# Altium PCB Digit.PcbDoc
Units mm, origin at the board's own origin, x right, y up, seen from the top; angles counter-clockwise.
Board outline 137.16 x 139.7 mm, 4 copper layers (Top Layer, Mid-Layer 1, Mid-Layer 2, Bottom Layer); 175 components, 147 nets, 626 pads, 146 vias.
Unrouted connection lines stored in the file: 3.
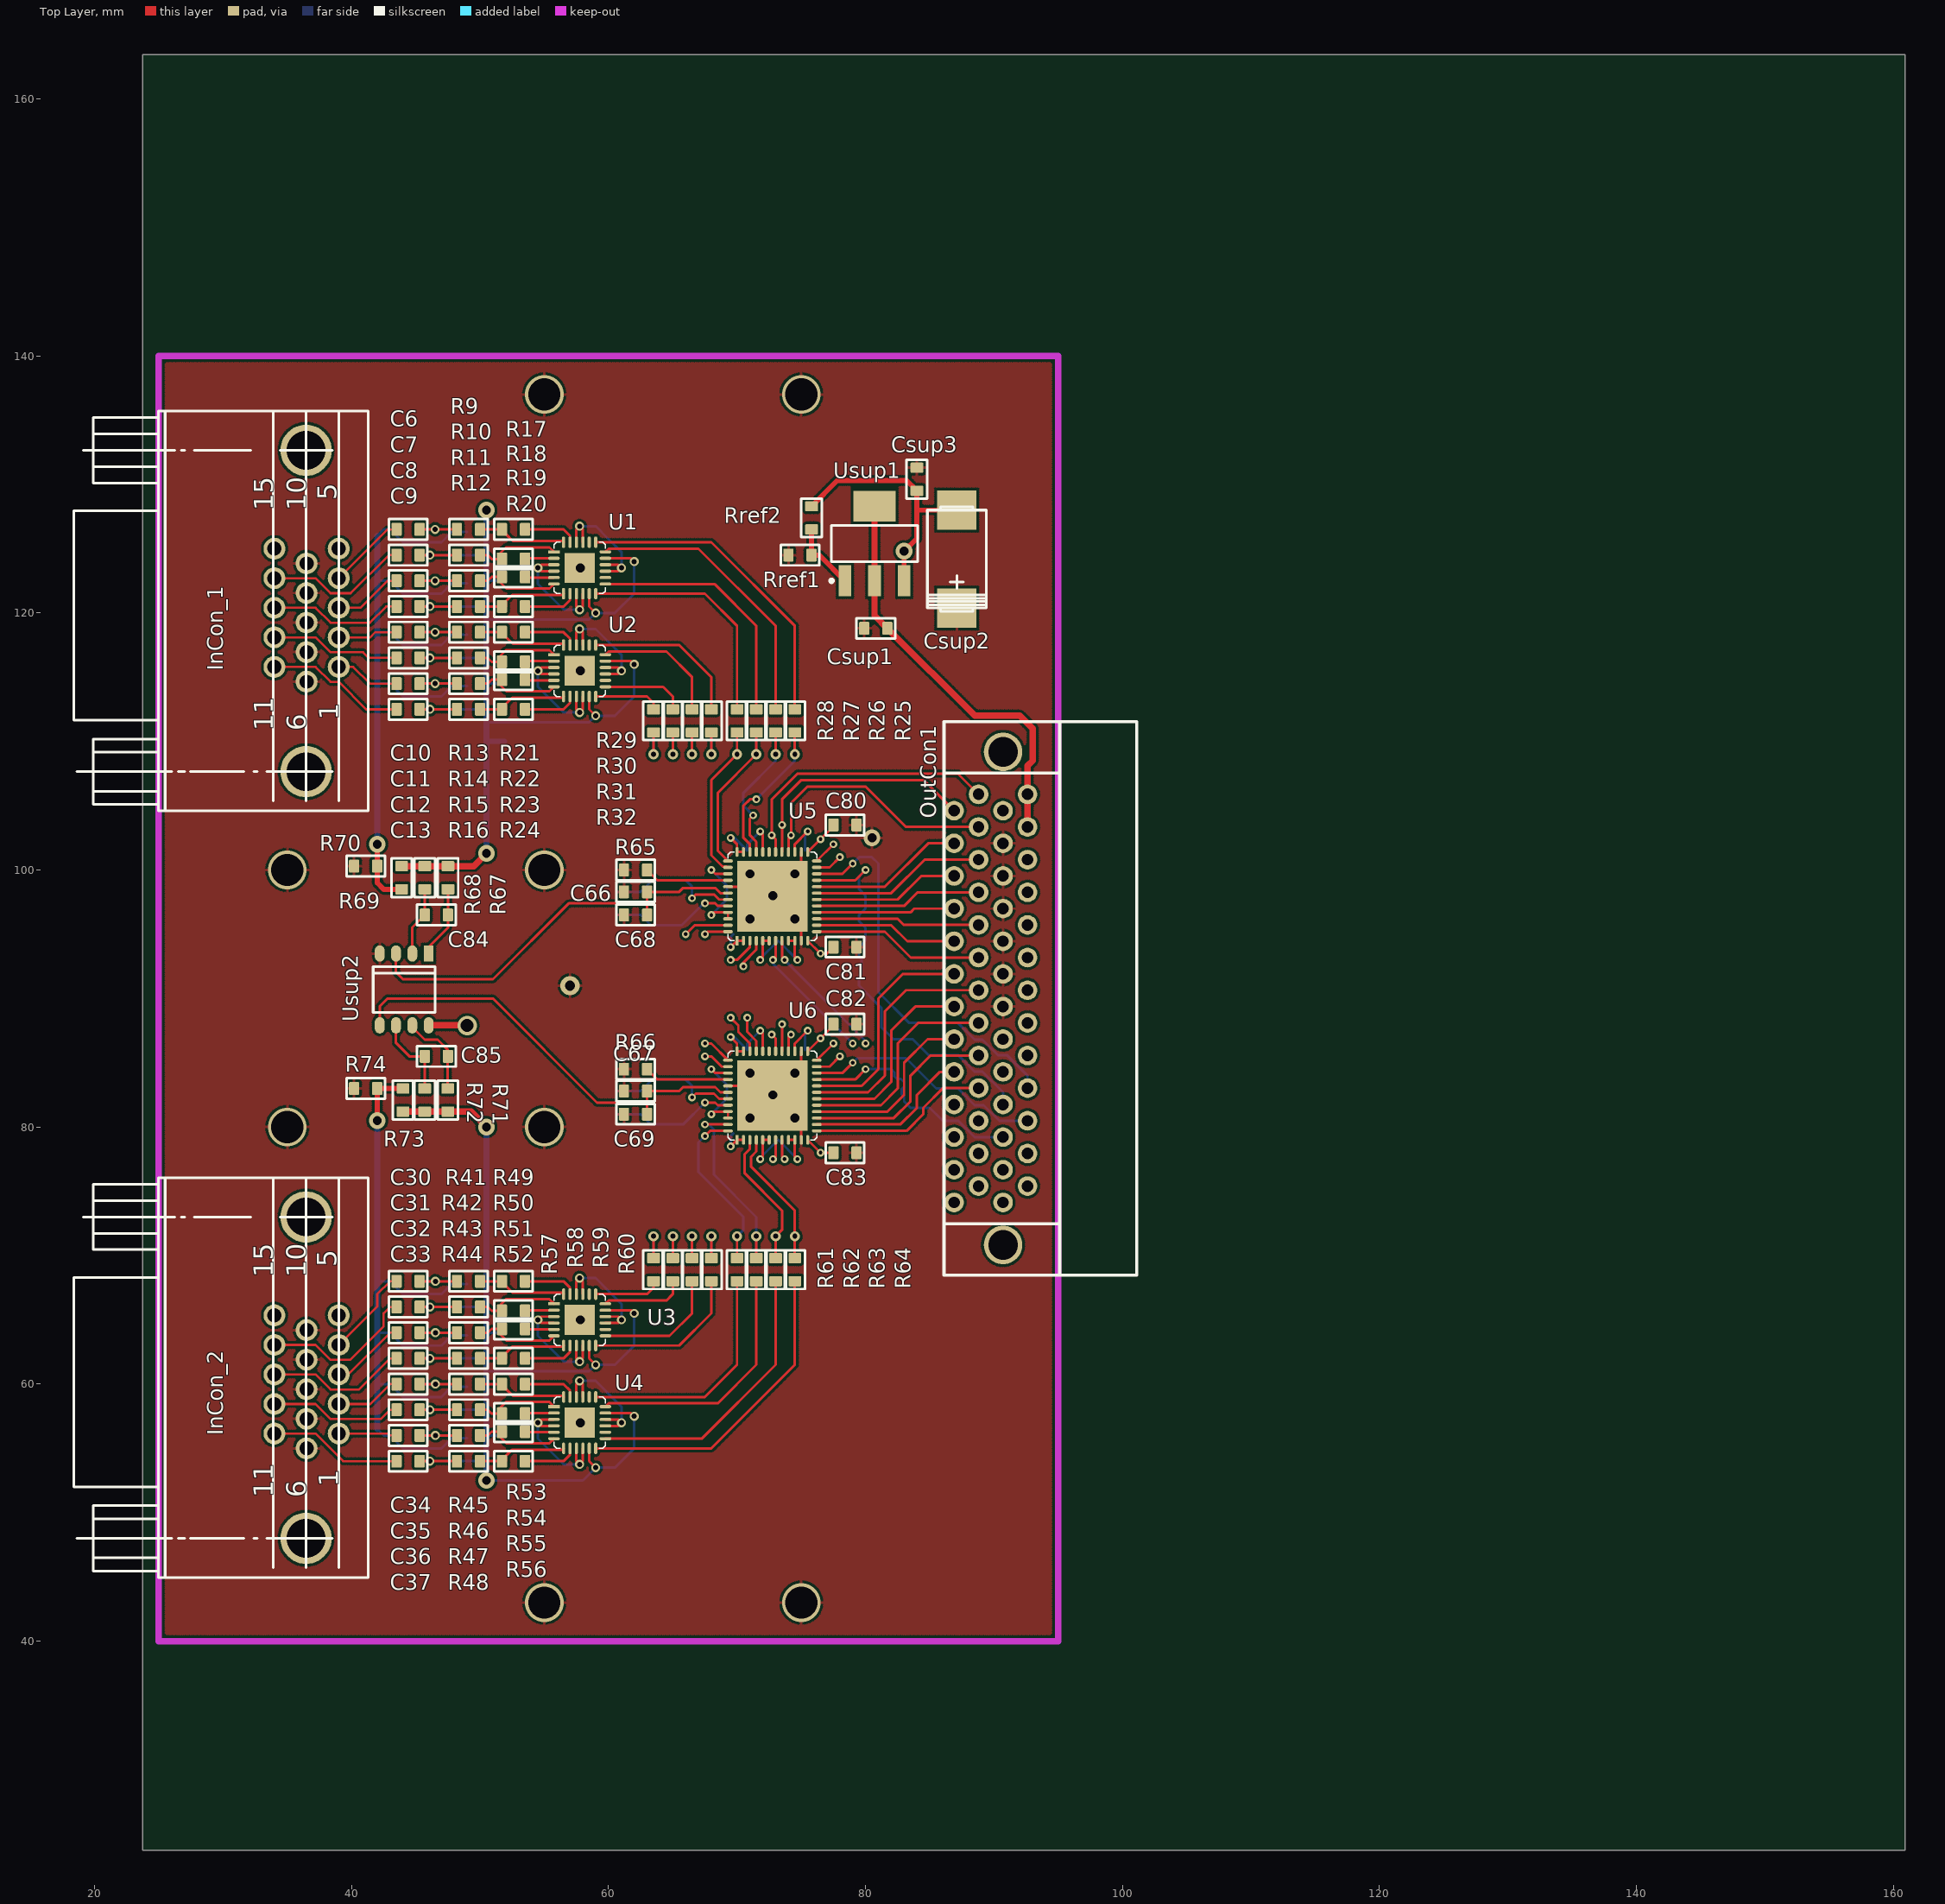
[diagram p0: Top Layer view]
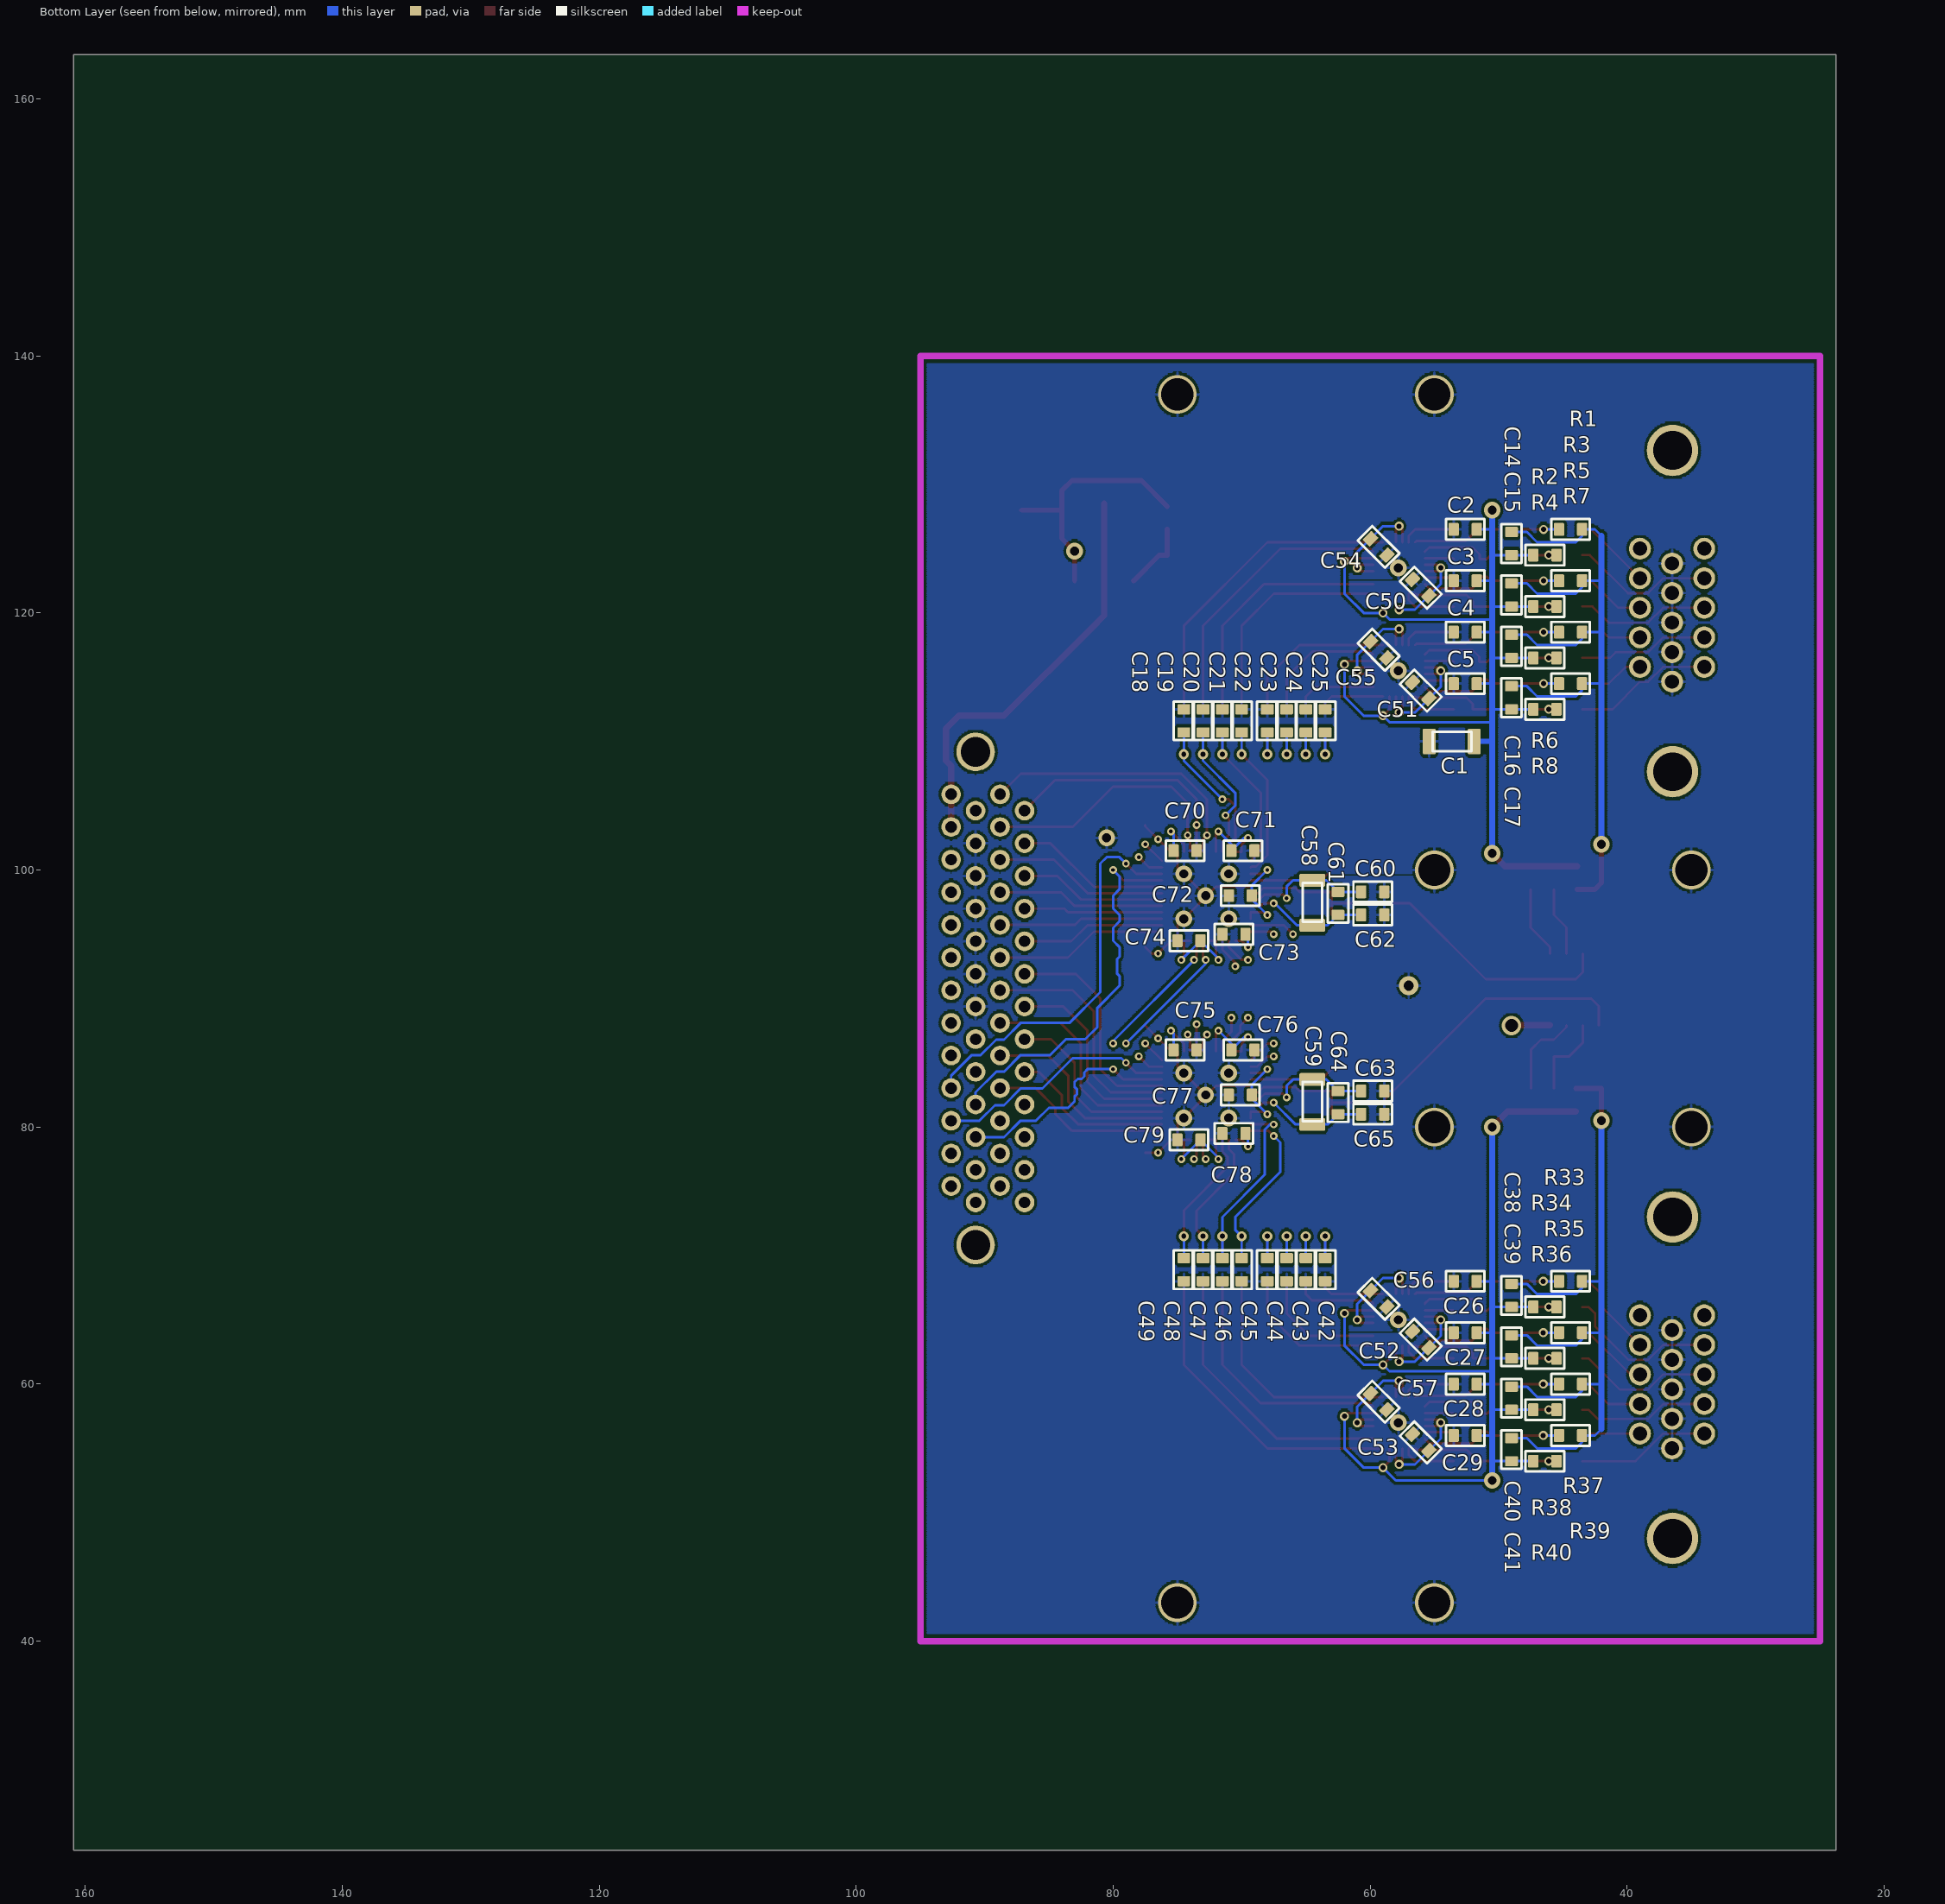
[diagram p1: Bottom Layer view, seen from below]
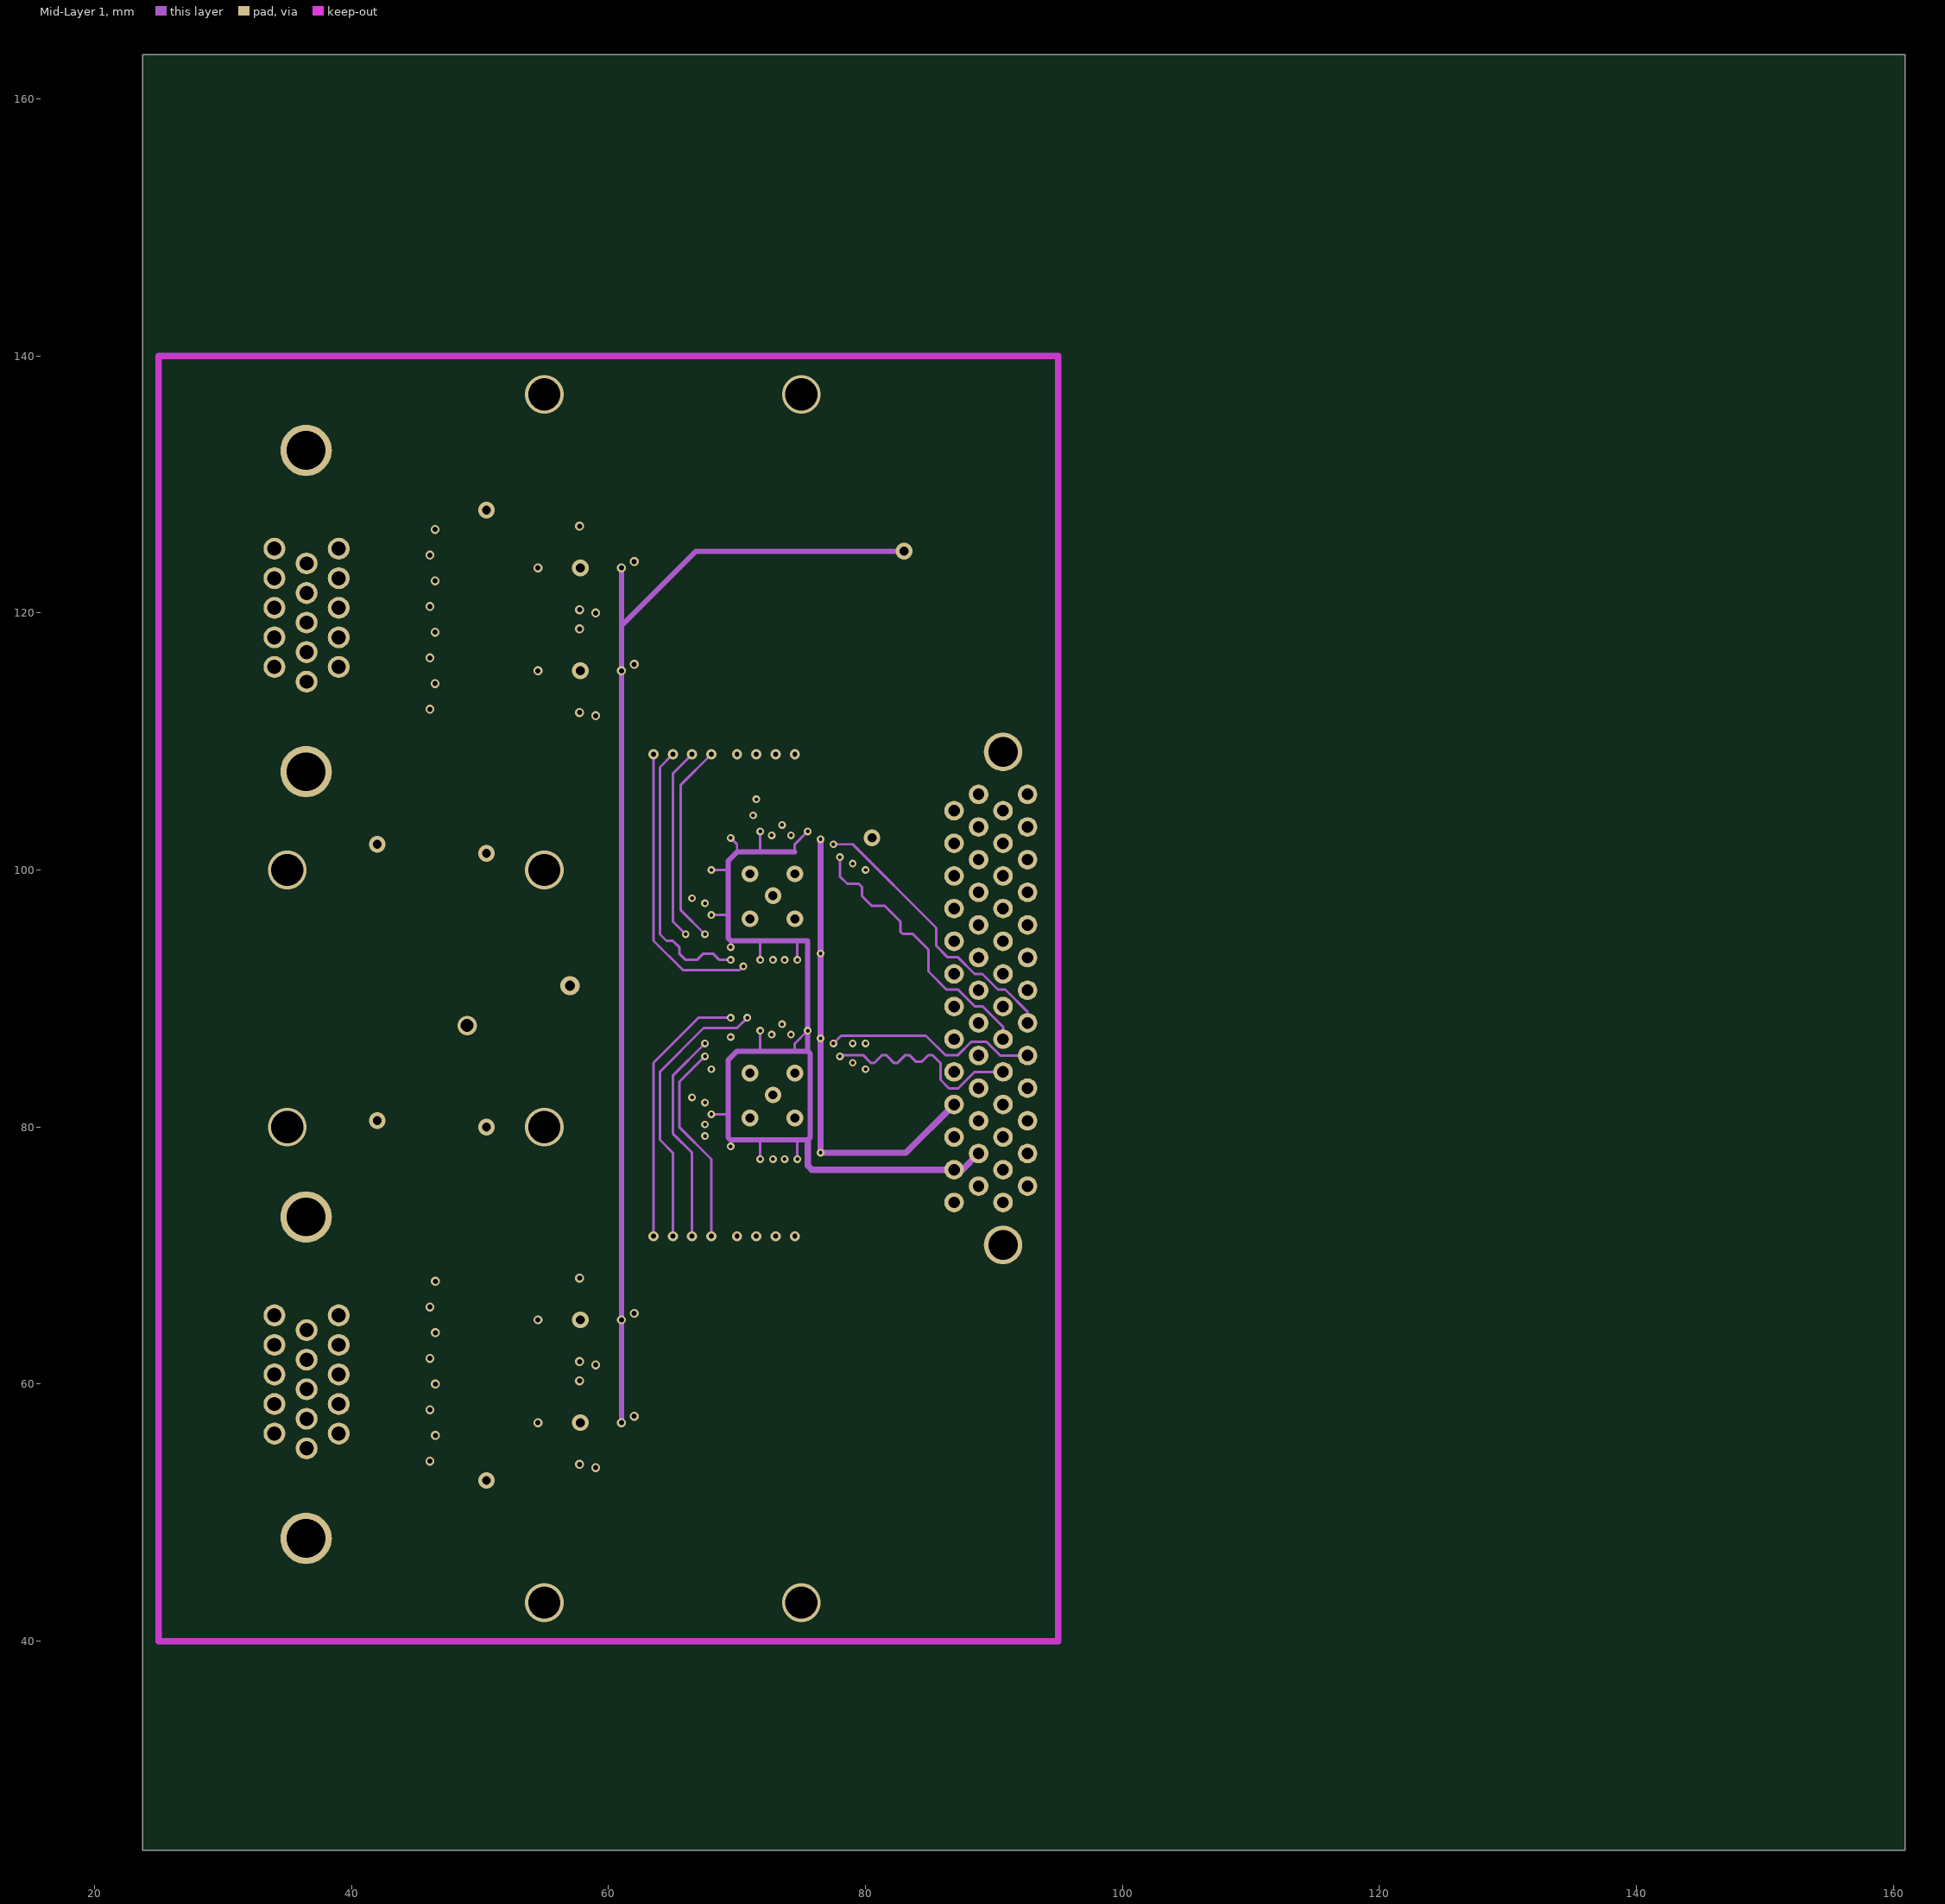
[diagram p2: Mid-Layer 1]
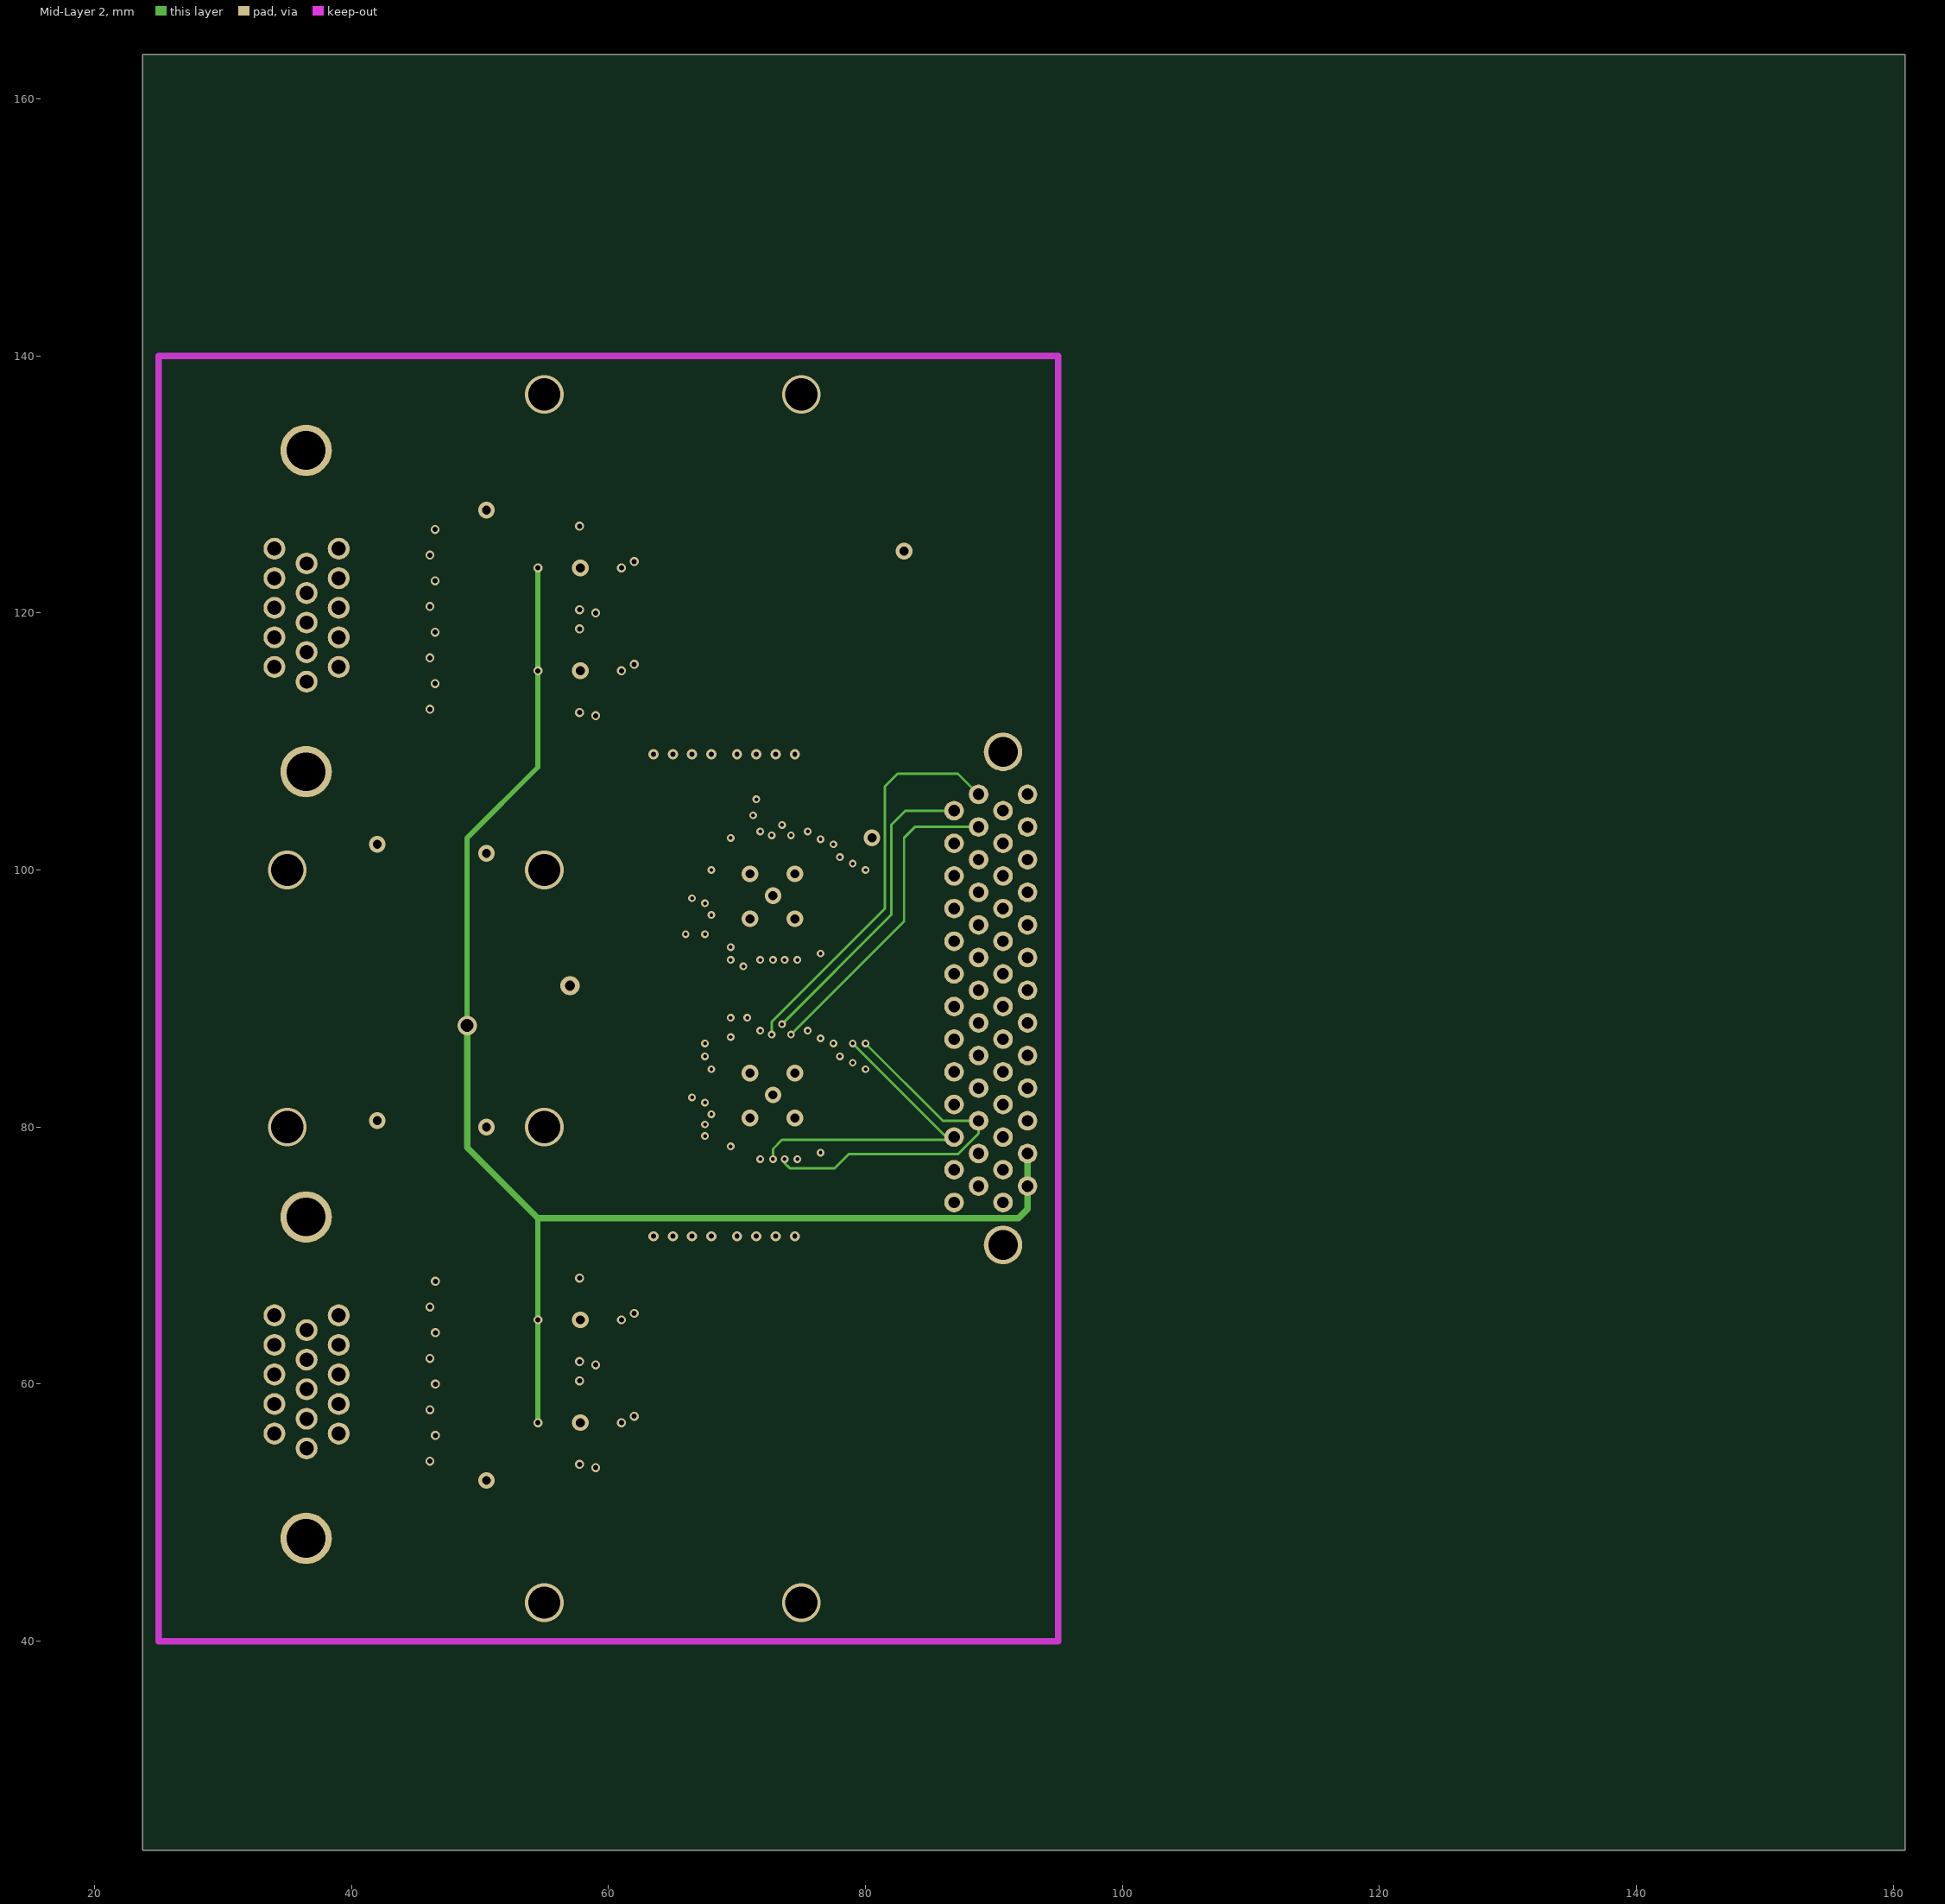
[diagram p3: Mid-Layer 2]

## Layer stack, top to bottom
Top Layer: signal copper 0.0356
Dielectric: core 0.32, FR-4, Dk 4.8
Mid-Layer 1: signal copper 0.0356
Dielectric: prepreg 0.32, FR-4, Dk 4.8
Mid-Layer 2: signal copper 0.0356
Dielectric: core 0.32, FR-4, Dk 4.8
Bottom Layer: signal copper 0.0356

## Board outline
23.73,23.73 23.73,163.43 160.89,163.43 160.89,23.73

## Design rules (kind name [scope] priority, off if disabled: settings)
Clearance [All] p1: gap=0.2
DiffPairsRouting [All] p1: maxlimit=0.25 minlimit=0.25 mostfreqgap=0.25 maxuncoupledlength=12.7
PasteMaskExpansion [All] p1: expansion=0.025
PlaneClearance [All] p1: clearance=0.5
PlaneConnect [All] p1: planeconnectstyle=Relief reliefexpansion=0.5 reliefentries=4 reliefconductorwidth=0.2 reliefairgap=0.2
PolygonConnect [All] p1: connectstyle=Relief reliefconductorwidth=0.2 reliefentries=4 polygonreliefangle="90 Angle"
RoomDefinition Digitizer [InComponentClass('Digitizer')] p1: confinementstyle=ConfineIn formatcopy=TRUE lockcomponents=FALSE outline 38.2,27 38.2,38.9 25,38.9 25,27
RoutingCorners [All] p1: cornerstyle=45-Degree minsetback=2.5 maxsetback=2.5
RoutingVias [All] p1: holewidth=0.8 width=1.2 viastyle="Through Hole" minholewidth=0.25 minwidth=0.4 maxholewidth=2.5 maxwidth=3
SilkscreenOverComponentPads [All] p1: minsilkscreentomaskgap=0.254
SolderMaskExpansion [All] p1: expansion=0.1
Width [All] p1: maxlimit=1 minlimit=0.15 preferedwidth=0.2 midlayer1_minwidth=0.175 midlayer2_minwidth=0.175 minimp=50.000000 maximp=50.000000 favimp=50.000000
22 further rules are at their usual default settings.

## Classes and differential pairs
differential pair UDIFF_CH8: +UDIFF_CH8_P -UDIFF_CH8_N
differential pair UDIFF_CH7: +UDIFF_CH7_P -UDIFF_CH7_N
differential pair UDIFF_CH6: +UDIFF_CH6_P -UDIFF_CH6_N
differential pair UDIFF_CH5: +UDIFF_CH5_P -UDIFF_CH5_N
differential pair UDIFF_CH4: +UDIFF_CH4_P -UDIFF_CH4_N
differential pair UDIFF_CH3: +UDIFF_CH3_P -UDIFF_CH3_N
differential pair UDIFF_CH2: +UDIFF_CH2_P -UDIFF_CH2_N
differential pair UDIFF_CH1: +UDIFF_CH1_P -UDIFF_CH1_N
differential pair OUTPUT_CH8: +OUTPUT_CH8_P -OUTPUT_CH8_N
differential pair OUTPUT_CH7: +OUTPUT_CH7_P -OUTPUT_CH7_N
differential pair OUTPUT_CH6: +OUTPUT_CH6_P -OUTPUT_CH6_N
differential pair OUTPUT_CH5: +OUTPUT_CH5_P -OUTPUT_CH5_N
differential pair OUTPUT_CH4: +OUTPUT_CH4_P -OUTPUT_CH4_N
differential pair OUTPUT_CH3: +OUTPUT_CH3_P -OUTPUT_CH3_N
differential pair OUTPUT_CH2: +OUTPUT_CH2_P -OUTPUT_CH2_N
differential pair OUTPUT_CH1: +OUTPUT_CH1_P -OUTPUT_CH1_N
differential pair FCO_2: +FCO_2_P -FCO_2_N
differential pair FCO_1: +FCO_1_P -FCO_1_N
differential pair CLK: +CLK_P -CLK_N
differential pair DCO_1: +DCO_1_P -DCO_1_N
differential pair DCO_2: +DCO_2_P -DCO_2_N

## Components (designator, comment, footprint, x,y, rotation, side; value= is the part's Value field where it differs from the comment)
C1 "10uF" chip1206 55.4,110 r180 bottom
C2 "0.1uF" CHIP0603 53.5,126.5 r180 bottom
C3 "0.1uF" CHIP0603 53.5,122.5 r180 bottom
C4 "0.1uF" CHIP0603 53.5,118.5 r180 bottom
C5 "0.1uF" CHIP0603 53.5,114.5 r180 bottom
C6 "1uF" CHIP0603 43.5,126.5 r0 top
C7 "1uF" CHIP0603 43.5,124.5 r0 top
C8 "1uF" CHIP0603 43.5,122.5 r0 top
C9 "1uF" CHIP0603 43.5,120.5 r0 top
C10 "1uF" CHIP0603 43.5,118.5 r0 top
C11 "1uF" CHIP0603 43.5,116.5 r0 top
C12 "1uF" CHIP0603 43.5,114.5 r0 top
C13 "1uF" CHIP0603 43.5,112.5 r0 top
C14 "1uF" CHIP0603 49,124.5 r90 bottom
C15 "1uF" CHIP0603 49,120.5 r90 bottom
C16 "1uF" CHIP0603 49,116.5 r90 bottom
C17 "1uF" CHIP0603 49,112.5 r90 bottom
C18 "56pF" CHIP0603 74.5,110.7 r90 bottom
C19 "56pF" CHIP0603 73,112.5 r270 bottom
C20 "56pF" CHIP0603 71.5,110.7 r90 bottom
C21 "56pF" CHIP0603 70,112.5 r270 bottom
C22 "56pF" CHIP0603 68,110.7 r90 bottom
C23 "56pF" CHIP0603 66.5,112.5 r270 bottom
C24 "56pF" CHIP0603 65,110.7 r90 bottom
C25 "56pF" CHIP0603 63.5,112.5 r270 bottom
C26 "0.1uF" CHIP0603 53.5,68 r180 bottom
C27 "0.1uF" CHIP0603 53.5,64 r180 bottom
C28 "0.1uF" CHIP0603 53.5,60 r180 bottom
C29 "0.1uF" CHIP0603 53.5,56 r180 bottom
C30 "1uF" CHIP0603 43.5,68 r0 top
C31 "1uF" CHIP0603 43.5,66 r0 top
C32 "1uF" CHIP0603 43.5,64 r0 top
C33 "1uF" CHIP0603 43.5,62 r0 top
C34 "1uF" CHIP0603 43.5,60 r0 top
C35 "1uF" CHIP0603 43.5,58 r0 top
C36 "1uF" CHIP0603 43.5,56 r0 top
C37 "1uF" CHIP0603 43.5,54 r0 top
C38 "1uF" CHIP0603 49,66 r90 bottom
C39 "1uF" CHIP0603 49,62 r90 bottom
C40 "1uF" CHIP0603 49,58 r90 bottom
C41 "1uF" CHIP0603 49,54 r90 bottom
C42 "56pF" CHIP0603 63.5,69.8 r270 bottom
C43 "56pF" CHIP0603 65,68 r90 bottom
C44 "56pF" CHIP0603 66.5,69.8 r270 bottom
C45 "56pF" CHIP0603 68,68 r90 bottom
C46 "56pF" CHIP0603 70,69.8 r270 bottom
C47 "56pF" CHIP0603 71.5,68 r90 bottom
C48 "56pF" CHIP0603 73,69.8 r270 bottom
C49 "56pF" CHIP0603 74.5,68 r90 bottom
C50 "0.1uF" chip0603 56.7,122.6 r225 bottom
C51 "0.1uF" CHIP0603 56.7,114.6 r225 bottom
C52 "0.1uF" chip0603 56.7,64.1 r225 bottom
C53 "0.1uF" CHIP0603 56.7,56.1 r225 bottom
C54 "0.1uF" chip0603 58.7,124.5 r45 bottom
C55 "0.1uF" chip0603 58.7,116.5 r45 bottom
C56 "0.1uF" chip0603 58.7,66 r45 bottom
C57 "0.1uF" CHIP0603 58.7,58 r45 bottom
C58 "4.7uF" chip1206 64.5,95.7 r90 bottom
C59 "4.7uF" CHIP1206 64.5,80.2 r90 bottom
C60 "0.1uF" CHIP0603 60.7,98.3 r180 bottom
C61 "0.1uF" CHIP0603 62.5,96.5 r90 bottom
C62 "0.1uF" CHIP0603 58.9,96.5 r0 bottom
C63 "0.1uF" CHIP0603 60.7,82.8 r180 bottom
C64 "0.1uF" CHIP0603 62.5,81 r90 bottom
C65 "0.1uF" CHIP0603 58.9,81 r0 bottom
C66 "1uF" CHIP0603 61.2,98.3 r0 top
C67 "1uF" chip0603 61.2,82.8 r0 top
C68 "0.1uF" CHIP0603 61.2,96.5 r0 top
C69 "0.1uF" CHIP0603 61.2,81 r0 top
C70 "0.1uF" CHIP0603 73.5,101.5 r0 bottom
C71 "0.1uF" CHIP0603 69,101.5 r0 bottom
C72 "0.1uF" CHIP0603 71,98 r180 bottom
C73 "0.1uF" CHIP0603 71.5,95 r180 bottom
C74 "0.1uF" CHIP0603 75,94.5 r180 bottom
C75 "0.1uF" CHIP0603 73.5,86 r0 bottom
C76 "0.1uF" CHIP0603 69,86 r0 bottom
C77 "0.1uF" CHIP0603 71,82.5 r180 bottom
C78 "0.1uF" CHIP0603 71.5,79.5 r180 bottom
C79 "0.1uF" CHIP0603 75,79 r180 bottom
C80 "0.1uF" CHIP0603 79.3,103.5 r180 top
C81 "0.1uF" CHIP0603 79.3,94 r180 top
C82 "0.1uF" CHIP0603 79.3,88 r180 top
C83 "0.1uF" CHIP0603 79.3,78 r180 top
C84 "0.47uF" CHIP0603 47.5,96.5 r180 top
C85 "0.47uF" CHIP0603 47.5,85.5 r180 top
Csup1 "0.47uF" CHIP0603 81.7,118.8 r180 top
Csup2 "100uF" CEL-SMD300 87.1,120.38 r90 top
Csup3 "0.47uF" CHIP0603 84,129.5 r90 top
InCon_1 "DHR-15F" DHR-F-15 36.46,107.65 r90 top
InCon_2 "DHR-15F" DHR-F-15 36.46,48 r90 top
OutCon1 "FX2-052P-1.27DSL(71)" FX2-52P-1.27DSL(71) 90.702,109.195 r270 top
R1 "20" CHIP0603 43.5,126.5 r0 bottom
R2 "20" CHIP0603 45.5,124.5 r0 bottom
R3 "20" CHIP0603 43.5,122.5 r0 bottom
R4 "20" CHIP0603 45.5,120.5 r0 bottom
R5 "20" CHIP0603 43.5,118.5 r0 bottom
R6 "20" CHIP0603 45.5,116.5 r0 bottom
R7 "20" CHIP0603 43.5,114.5 r0 bottom
R8 "20" CHIP0603 45.5,112.5 r0 bottom
R9 "510" CHIP0603 50,126.5 r180 top
R10 "510" CHIP0603 50,124.5 r180 top
R11 "510" CHIP0603 50,122.5 r180 top
R12 "510" CHIP0603 50,120.5 r180 top
R13 "510" CHIP0603 50,118.5 r180 top
R14 "510" CHIP0603 50,116.5 r180 top
R15 "510" CHIP0603 50,114.5 r180 top
R16 "510" CHIP0603 50,112.5 r180 top
R17 "510" CHIP0603 51.7,126.5 r0 top
R18 "510" CHIP0603 53.5,124.2 r180 top
R19 "510" CHIP0603 51.7,122.8 r0 top
R20 "510" CHIP0603 53.5,120.5 r180 top
R21 "510" CHIP0603 51.7,118.5 r0 top
R22 "510" CHIP0603 53.5,116.2 r180 top
R23 "510" CHIP0603 51.7,114.8 r0 top
R24 "510" CHIP0603 53.5,112.5 r180 top
R25 "100" CHIP0603 74.5,112.5 r270 top
R26 "100" CHIP0603 73,112.5 r270 top
R27 "100" CHIP0603 71.5,112.5 r270 top
R28 "100" CHIP0603 70,112.5 r270 top
R29 "100" CHIP0603 68,112.5 r270 top
R30 "100" CHIP0603 66.5,112.5 r270 top
R31 "100" CHIP0603 65,112.5 r270 top
R32 "100" CHIP0603 63.5,112.5 r270 top
R33 "20" CHIP0603 43.5,68 r0 bottom
R34 "20" CHIP0603 45.5,66 r0 bottom
R35 "20" CHIP0603 43.5,64 r0 bottom
R36 "20" CHIP0603 45.5,62 r0 bottom
R37 "20" CHIP0603 43.5,60 r0 bottom
R38 "20" CHIP0603 45.5,58 r0 bottom
R39 "20" CHIP0603 43.5,56 r0 bottom
R40 "20" CHIP0603 45.5,54 r0 bottom
R41 "510" CHIP0603 50,68 r180 top
R42 "510" CHIP0603 50,66 r180 top
R43 "510" CHIP0603 50,64 r180 top
R44 "510" CHIP0603 50,62 r180 top
R45 "510" CHIP0603 50,60 r180 top
R46 "510" CHIP0603 50,58 r180 top
R47 "510" CHIP0603 50,56 r180 top
R48 "510" CHIP0603 50,54 r180 top
R49 "510" CHIP0603 51.7,68 r0 top
R50 "510" CHIP0603 53.5,65.7 r180 top
R51 "510" CHIP0603 51.7,64.3 r0 top
R52 "510" CHIP0603 53.5,62 r180 top
R53 "510" CHIP0603 51.7,60 r0 top
R54 "510" CHIP0603 53.5,57.7 r180 top
R55 "510" CHIP0603 51.7,56.3 r0 top
R56 "510" CHIP0603 53.5,54 r180 top
R57 "100" CHIP0603 63.5,68 r90 top
R58 "100" CHIP0603 65,68 r90 top
R59 "100" CHIP0603 66.5,68 r90 top
R60 "100" CHIP0603 68,68 r90 top
R61 "100" CHIP0603 70,68 r90 top
R62 "100" CHIP0603 71.5,68 r90 top
R63 "100" CHIP0603 73,68 r90 top
R64 "100" CHIP0603 74.5,68 r90 top
R65 "10k" CHIP0603 63,100 r180 top
R66 "10k" CHIP0603 63,84.5 r180 top
R67 "68" chip0603 47.5,98.5 r90 top
R68 "5k6" chip0603 45.7,98.5 r90 top
R69 "510" chip0603 43.9,100.3 r270 top
R70 "20" chip0603 42,100.3 r180 top
R71 "68" CHIP0603 47.49,83 r270 top
R72 "5k6" CHIP0603 45.69,83 r270 top
R73 "2k" CHIP0603 44,81.2 r90 top
R74 "20" CHIP0603 42,83 r180 top
Rref1 "90" chip0603 75.8,124.5 r180 top
Rref2 "120" chip0603 75.8,128.3 r270 top
U1 "AD4932-2" CP-24-13 55.75,124.75 r0 top
U2 "AD4932-2" CP-24-13 55.75,116.75 r0 top
U3 "AD4932-2" CP-24-13 55.75,66.25 r0 top
U4 "AD4932-2" CP-24-13 55.75,58.25 r0 top
U5 "AD9287" CP-48-8 70,94.5 r90 top
U6 "AD9287" CP-48-8 70,79 r90 top
Usup1 "LM337" SOT223_N 80.7,125.4 r90 top
Usup2 "AD8602" 8SO200 46,93.5 r180 top

## Footprints (in the part's own frame and the unit in brackets; to place one, negate y for a bottom-side part, rotate by r counter-clockwise, add the part's x,y. Pads: shape width x height; smd on the part's side, far side on the other; paste and mask are expansions set on the pad)
8SO200 [mil]
  rect 30x50 smd: 1(0,0)
  oval 30x50 smd: 2(50,0) 3(100,0) 4(150,0) 5(150,220) 6(100,220) 7(50,220) 8(0,220)
  silkscreen extent -20,40 170,180
CEL-SMD300 [mil]
  rect 120x120 smd: +(0,0) -(300,0)
  silkscreen extent -10,-90 310,90
CHIP0603 [mm]
  rrect20% 0.8x1 smd: 1(0,0) 2(1.8,0)
  silkscreen extent -0.6,-0.8 2.4,0.8
chip0603 [mm]
  rrect20% 0.8x1 smd: 1(0,0) 2(1.8,0)
  silkscreen extent -0.6,-0.8 2.4,0.8
chip1206 [mm]
  rrect20% 1x2 smd: 1(0,0) 2(3.5,0)
  silkscreen extent 0.25,-0.76 3.3,0.76
CHIP1206 [mm]
  rrect20% 1x2 smd: 1(0,0) 2(3.5,0)
  silkscreen extent 0.25,-0.76 3.3,0.76
CP-24-13 [mm]
  rect 0.9x0.25 smd: 1(0,0)
  oval 0.9x0.25 smd: 2(0,-0.5) 3(0,-1) 4(0,-1.5) 5(0,-2) 6(0,-2.5) 13(4,-2.5) 14(4,-2) 15(4,-1.5) 16(4,-1) 17(4,-0.5) 18(4,0)
  oval 0.25x0.9 smd: 7(0.75,-3.25) 8(1.25,-3.25) 9(1.75,-3.25) 10(2.25,-3.25) 11(2.75,-3.25) 12(3.25,-3.25) 19(3.25,0.75) 20(2.75,0.75) 21(2.25,0.75) 22(1.75,0.75) 23(1.25,0.75) 24(0.75,0.75)
  rect 2.34x2.34 smd: 25(2,-1.25)
  silkscreen extent 0,-3.25 4,0.75
CP-48-8 [mm]
  rect 5.5x5.5 smd: 0(3.45,-2.75)
  rect 0.75x0.25 smd: 1(0,0)
  oval 0.75x0.25 smd: 2(0,-0.5) 3(0,-1) 4(0,-1.5) 5(0,-2) 6(0,-2.5) 7(0,-3) 8(0,-3.5) 9(0,-4) 10(0,-4.5) 11(0,-5) 12(0,-5.5) 25(6.9,-5.5) 26(6.9,-5) 27(6.9,-4.5) 28(6.9,-4) 29(6.9,-3.5) 30(6.9,-3) 31(6.9,-2.5) 32(6.9,-2) 33(6.9,-1.5) 34(6.9,-1) 35(6.9,-0.5) 36(6.9,0)
  oval 0.25x0.75 smd: 13(0.7,-6.2) 14(1.2,-6.2) 15(1.7,-6.2) 16(2.2,-6.2) 17(2.7,-6.2) 18(3.2,-6.2) 19(3.7,-6.2) 20(4.2,-6.2) 21(4.7,-6.2) 22(5.2,-6.2) 23(5.7,-6.2) 24(6.2,-6.2) 37(6.2,0.706) 38(5.7,0.706) 39(5.2,0.706) 40(4.7,0.706) 41(4.2,0.706) 42(3.7,0.706) 43(3.2,0.706) 44(2.7,0.706) 45(2.2,0.706) 46(1.7,0.706) 47(1.2,0.706) 48(0.7,0.706)
  silkscreen extent 0,-6.2 6.9,0.7
DHR-F-15 [mm]
  round 1.7 hole 1.1: 1(8.15,-2.54) 2(10.45,-2.54) 3(12.75,-2.54) 4(15.05,-2.54) 5(17.35,-2.54) 6(7,-0.04) 7(9.3,-0.04) 8(11.6,-0.04) 9(13.9,-0.04) 10(16.2,-0.04) 11(8.15,2.46) 12(10.45,2.46) 13(12.75,2.46) 14(15.05,2.46) 15(17.35,2.46)
  round 4 hole 3: 16(0,0) 17(25,0)
  silkscreen extent -3.05,-4.83 28.05,18.08
FX2-52P-1.27DSL(71) [mm]
  round 3 hole 2.3: 27(0,0) 28(38.37,0)
  round 1.524 hole 0.9: A1(3.31,-1.905) A2(4.58,-3.81) A3(5.85,-1.905) A4(7.12,-3.81) A5(8.39,-1.905) A6(9.66,-3.81) A7(10.93,-1.905) A8(12.2,-3.81) A9(13.47,-1.905) A10(14.74,-3.81) A11(16.01,-1.905) A12(17.28,-3.81) A13(18.55,-1.905) A14(19.82,-3.81) A15(21.09,-1.905) A16(22.36,-3.81) A17(23.63,-1.905) A18(24.9,-3.81) A19(26.17,-1.905) A20(27.44,-3.81) A21(28.71,-1.905) A22(29.98,-3.81) A23(31.25,-1.905) A24(32.52,-3.81) A25(33.79,-1.905) A26(35.06,-3.81) B1(3.31,1.905) B2(4.58,0) B3(5.85,1.905) B4(7.12,0) B5(8.39,1.905) B6(9.66,0) B7(10.93,1.905) B8(12.2,0) B9(13.47,1.905) B10(14.74,0) B11(16.01,1.905) B12(17.28,0) B13(18.55,1.905) B14(19.82,0) B15(21.09,1.905) B16(22.36,0) B17(23.63,1.905) B18(24.9,0) B19(26.17,1.905) B20(27.44,0) B21(28.71,1.905) B22(29.98,0) B23(31.25,1.905) B24(32.52,0) B25(33.79,1.905) B26(35.06,0)
  silkscreen extent -2.35,-4.59 40.72,10.41
SOT223_N [mm] "SOT223, 4-Leads, Body 6.5x3.5mm, Pitch 2.3mm, Lead Span 7mm, IPC Medium Density"
  rect 2.4x1 smd: 1(-2.9,2.3) 2(-2.9,0) 3(-2.9,-2.3)
  rect 2.4x3.3 smd: 4(2.9,0)
  silkscreen extent -3.02,-3.35 1.4,3.47, body extent -1.85,-3.35 1.85,3.35, height 1.7

## Part data
C1 C2 C3 C4 C5 C6 C7 C8 C9 C10 C11 C12 C13 C14 C15 C16 C17 C18 C19 C20 C21 C22 C23 C24 C25 C26 C27 C28 C29 C30 C31 C32 C33 C34 C35 C36 C37 C38 C39 C40 C41 C42 C43 C44 C45 C46 C47 C48 C49 C50 C51 C52 C53 C54 C55 C56 C57 C60 C61 C62 C63 C64 C65 C66 C67 C68 C69 C70 C71 C72 C73 C74 C75 C76 C77 C78 C79 C80 C81 C82 C83 C84 C85 Csup1 Csup3: library part C
C58 C59 Csup2: library part "C POL"
R1 R2 R3 R4 R5 R6 R7 R8 R9 R10 R11 R12 R13 R14 R15 R16 R17 R18 R19 R20 R21 R22 R23 R24 R25 R26 R27 R28 R29 R30 R31 R32 R33 R34 R35 R36 R37 R38 R39 R40 R41 R42 R43 R44 R45 R46 R47 R48 R49 R50 R51 R52 R53 R54 R55 R56 R57 R58 R59 R60 R61 R62 R63 R64 R65 R66 R67 R68 R69 R70 R71 R72 R73 R74: library part R
Rref1 Rref2: library part MLT
Usup1: "3-Terminal Adjustable Negative Regulators"
Usup2: library part KR1040UD1

## Via types
v1: diameter 0.6, hole 0.3, Top Layer to Bottom Layer, 58 vias
v2: diameter 0.7, hole 0.4, Top Layer to Bottom Layer, 40 vias
v3: diameter 1.3, hole 0.7, Top Layer to Bottom Layer, 22 vias
v4: diameter 0.8, hole 0.4, Top Layer to Bottom Layer, 16 vias
v5: diameter 3, hole 2.5, Top Layer to Bottom Layer, 8 vias
v6: diameter 1.5, hole 0.8, Top Layer to Bottom Layer, 1 vias
v7: diameter 1.5, hole 1, Top Layer to Bottom Layer, 1 vias

## Nets (pads, with @x,y where several pads share a name; then routed paths per layer and width w, separated by ;. In a path a pad name is that pad's centre, name@x,y a point inside that pad or via, vN(x,y) a via of type N, cw(c..) or ccw(c..) an arc to the next point about the centre after c; other vN are vias at no path point)
"+1.8 V": C70.2 C71.2 C72.2 C73.2 C74.2 C75.2 C76.2 C77.2 C78.2 C79.2 OutCon1.A23 OutCon1.A24 U5.1 U5.2 U5.5 U5.6 U5.9 U5.10 U5.27 U5.32 U5.35 U5.36 U5.39 U5.45 U5.46 U6.1 U6.2 U6.5 U6.6 U6.9 U6.10 U6.27 U6.32 U6.35 U6.36 U6.39 U6.45 U6.46 | length 145.8
  Top Layer w0.2: v1(68,81) 68.2,81.2 U6.45 U6.46 ; v1(68,84.5) 68.3,84.2 U6.39 ; v1(68,96.5) 68.2,96.7 U5.45 U5.46 ; v1(68,100) 68.3,99.7 U5.39 ; v1(69.5,78.5) U6.1 U6.2 ; v1(69.5,87) 70,86.5 U6.36 U6.35 ; v1(69.5,94) U5.1 U5.2 ; v1(69.5,102.5) 70,102 U5.36 U5.35 ; v1(71.8,77.5) 72,77.7 U6.5 U6.6 ; v1(71.8,87.5) 72,87.3 U6.32 ; v1(71.8,93) 72,93.2 U5.5 U5.6 ; v1(71.8,103) 72,102.8 U5.32 ; U6.9 U6.10 74.5,77.7 v1(74.7,77.5) ; U5.9 U5.10 74.5,93.2 v1(74.7,93) ; U6.27 74.5,86.5 v1(75.5,87.5) ; U5.27 74.5,102 v1(75.5,103)
  Mid-Layer 1 w0.2: v1(68,81) 69.3,81 ; v1(68,96.5) 69.3,96.5 ; v1(68,100) 69.3,100 ; v1(69.5,78.5) 69.5,79 ; v1(69.5,94) 69.5,94.5 ; v1(69.5,102.5) 70,102 70,101.4 ; v1(71.8,77.5) 71.8,79 ; 71.8,85.9 v1(71.8,87.5) ; v1(71.8,93) 71.8,94.5 ; 71.8,101.4 v1(71.8,103) ; 74.5,85.9 74.5,86.5 v1(75.5,87.5) ; 74.5,101.4 74.5,102 v1(75.5,103) ; v1(74.7,77.5) 74.7,79 ; v1(74.7,93) 74.7,94.5
  Mid-Layer 1 w0.4: 74.5,101.4 71.8,101.4 70,101.4 69.3,100.7 69.3,100 69.3,96.5 69.3,94.7 69.5,94.5 71.8,94.5 74.7,94.5 75.5,94.5 v1(75.5,87.5) 75.5,85.9 ; 75.5,85.9 75.7,85.7 75.7,79.2 75.5,79 71.8,79 69.5,79 69.3,79.2 69.3,81 69.3,85.2 70,85.9 71.8,85.9 74.5,85.9 75.5,85.9
  Mid-Layer 1 w0.5: 75.5,79 75.5,77 75.825,76.675 OutCon1.A24 87.527,76.675 OutCon1.A23
  Bottom Layer w0.2: v1(68,81) 69.2,82.2 C77.2 69.2,83.3 v1(68,84.5) ; v1(68,96.5) 69.2,97.7 C72.2 69.2,98.8 v1(68,100) ; v1(69.5,78.5) 69.5,79.3 C78.2 ; v1(69.5,87) 69.8,87 C76.2 70.8,86.5 v1(71.8,87.5) ; v1(69.5,94) 69.5,94.8 C73.2 ; v1(69.5,102.5) 69.8,102.5 C71.2 70.8,102 v1(71.8,103) ; v1(71.8,77.5) 71.8,77.6 C79.2 v1(74.7,77.5) ; v1@71.8,93.1 C74.2 v1(74.7,93) ; C75.2 75.3,87.3 v1(75.5,87.5) ; C70.2 75.3,102.8 v1(75.5,103)
"+1.8 VDIG": C80.2 C81.2 C82.2 C83.2 OutCon1.A20 U5.12 U5.25 U6.12 U6.25 | length 47.2
  Top Layer w0.2: U6.12 v1(76.5,78) C83.2 ; U6.25 v1(76.5,86.9) 77.5,87.9 C82.2 ; U5.12 v1(76.5,93.5) 77,93.5 C81.2 ; U5.25 v1(76.5,102.4) 77.5,103.4 C80.2
  Mid-Layer 1 w0.5: v1(76.5,102.4) v1(76.5,78) 83.137,78 OutCon1.A20
"+5 V": C50.2 C51.2 C52.2 C53.2 OutCon1.B23 OutCon1.B25 U1.3 U1.4 U1.9 U1.10 U2.3 U2.4 U2.9 U2.10 U3.3 U3.4 U3.9 U3.10 U4.3 U4.4 U4.9 U4.10 Usup2.8 | length 159.7
  Top Layer w0.2: U4.4 54.75,56.75 v2(54.5,57) 54.75,57.25 U4.3 ; U3.4 54.75,64.75 v2(54.5,65) 54.75,65.25 U3.3 ; U2.4 54.75,115.25 v2(54.5,115.5) 54.75,115.75 U2.3 ; U1.4 54.75,123.25 v2(54.5,123.5) 54.75,123.75 U1.3 ; U4.9 57.5,54 v2(57.75,53.75) 58,54 U4.10 ; U3.9 57.5,62 v2(57.75,61.75) 58,62 U3.10 ; U2.9 57.5,112.5 v2(57.75,112.25) 58,112.5 U2.10 ; U1.9 57.5,120.5 v2(57.75,120.25) 58,120.5 U1.10
  Top Layer w0.5: Usup2.8 v7@49,87.912
  Mid-Layer 2 w0.4: v7@49,87.912 49,102.5 54.5,108 v2(54.5,123.5) ; v2(54.5,57) 54.5,72.9
  Mid-Layer 2 w0.5: v7(49,87.9) 49,78.4 54.5,72.9 91.9,72.9 92.607,73.607 OutCon1.B25 OutCon1.B23
  Bottom Layer w0.2: v2(54.5,57) 54.5,55.754 56.504,53.75 v2(57.75,53.75) ; v2(54.5,65) 54.5,63.754 56.504,61.75 v2(57.75,61.75) ; v2(54.5,115.5) 54.5,114.254 56.504,112.25 v2(57.75,112.25) ; v2(54.5,123.5) 54.5,122.254 56.504,120.25 v2(57.75,120.25)
"-3 V": C54.2 C55.2 C56.2 C57.2 Csup2.- Csup3.1 Rref2.1 U1.15 U1.16 U1.21 U1.22 U2.15 U2.16 U2.21 U2.22 U3.15 U3.16 U3.21 U3.22 U4.15 U4.16 U4.21 U4.22 Usup1.3 | length 153.7
  Top Layer w0.2: U4.22 57.5,60 v2(57.75,60.25) 58,60 U4.21 ; U3.22 57.5,68 v2(57.75,68.25) 58,68 U3.21 ; U2.22 57.5,118.5 v2(57.75,118.75) 58,118.5 U2.21 ; U1.22 57.5,126.5 v2(57.75,126.75) 58,126.5 U1.21 ; U4.15 60.75,56.75 v2(61,57) 60.75,57.25 U4.16 ; U3.15 60.75,64.75 v2(61,65) 60.75,65.25 U3.16 ; U2.15 60.75,115.25 v2(61,115.5) 60.75,115.75 U2.16 ; U1.15 60.75,123.25 v2(61,123.5) 60.75,123.75 U1.16
  Top Layer w0.4: Rref2.1 77.8,130.3 83.2,130.3 Csup3.1 84,128 ; Usup1.3 v3(83,124.8) 84,125.8 84,128 ; Csup2.- 84,128
  Mid-Layer 1 w0.4: v2(61,57) v2(61,65) v2(61,115.5) 61,119 ; v2(61,123.5) 61,119 ; v3@83,124.798 66.798,124.798 61,119
  Bottom Layer w0.2: v2(57.75,60.25) 58.996,60.25 C57.2 61,58.246 v2(61,57) ; v2(57.75,68.25) 58.996,68.25 C56.2 61,66.246 v2(61,65) ; v2(57.75,118.75) 58.996,118.75 C55.2 61,116.746 v2(61,115.5) ; v2(57.75,126.75) 58.996,126.75 C54.2 61,124.746 v2(61,123.5)
"-5 V": Csup1.1 OutCon1.B1 OutCon1.B3 Usup1.2 Usup1.4 | length 32.5
  Top Layer w0.5: Usup1.4@80.7,128.5 Usup1.4 Usup1.2 80.7,119.8 Csup1.1 88.5,112 92,112 93,111 93,108.5 92.607,108.107 OutCon1.B1 OutCon1.B3
AGND: 
CALIB: InCon_1.5 InCon_2.5
CLK_N: OutCon1.A22 U5.7 U6.7 | length 38.4
  Top Layer w0.2: v1(72.8,77.5) 73,77.7 U6.7 ; v1(72.8,93) 73,93.2 U5.7
  Mid-Layer 2 w0.2: v1(72.8,77.5) 72.8,78.3 73.5,79 86.677,79 OutCon1.A22 86.285,79.215 v1(79,86.5)
  Bottom Layer w0.2: v1(72.8,93) 72.8,92.7 v1(79,86.5)
CLK_P: OutCon1.A21 U5.8 U6.8 | length 41.2
  Top Layer w0.2: U6.8 73.5,77.7 v1(73.7,77.5) ; U5.8 73.5,93.2 v1(73.7,93)
  Mid-Layer 2 w0.2: v1(73.7,77.5) 73.7,77.2 74.1,76.8 77.6,76.8 78.7,77.9 87.2,77.9 88.797,79.497 OutCon1.A21 86.015,80.485 v1(80,86.5)
  Bottom Layer w0.2: v1(73.7,93) 80,86.7 v1(80,86.5)
CSB: OutCon1.A1 U5.30 U6.30 | length 54.6
  Top Layer w0.2: v1(72.7,87.2) 73,86.9 U6.30 ; U5.30 73,102.4 v1(72.7,102.7) 72.7,105.5 74.7,107.5 87.182,107.5 OutCon1.A1
  Mid-Layer 2 w0.2: v1(72.7,87.2) 72.7,88.2 81.5,97 81.5,106.5 82.5,107.5 87.182,107.5 OutCon1.A1
  other v1: 72.7,102.7
DCO_1_N: OutCon1.B16 U5.23 | length 24
  Top Layer w0.2: U5.23 77.2,100.2 v1(78,101)
  Mid-Layer 1 w0.2: v1(78,101) 78,99.5 78.575,98.925 79.475,98.925 79.725,98.675 79.725,97.975 80.5,97.2 81.5,97.2 82.725,95.975 82.725,95.175 82.875,95.025 83.675,95.025 84.9,93.8 84.9,92.1 86.3,90.7 87.2,90.7 88.5,89.4 89.1,89.4 90.702,87.798 OutCon1.B16
DCO_1_P: OutCon1.B15 U5.24 | length 24
  Top Layer w0.2: U5.24 v1(77.5,102)
  Mid-Layer 1 w0.2: v1(77.5,102) 79,102 85.5,95.5 85.5,94.1 86.4,93.2 87.2,93.2 88.5,91.9 89.1,91.9 90.3,90.7 90.879,90.7 92.607,88.972 OutCon1.B15
DCO_2_N: OutCon1.B18 U6.23 | length 18.7
  Top Layer w0.2: U6.23 77.2,84.7 v1(78,85.5)
  Mid-Layer 1 w0.2: v1(78,85.5) 78.1,85.6 79.8,85.6 80.4,85 80.7,85 81.3,85.6 81.6,85.6 82.2,85 82.5,85 83.1,85.6 83.4,85.6 83.9,85.1 84.4,85.1 84.9,85.6 85.2,85.6 85.83,84.97 85.83,83.67 86.5,83 87.2,83 88.495,84.295 OutCon1.B18
DCO_2_P: OutCon1.B17 U6.24 | length 18.7
  Top Layer w0.2: U6.24 v1(77.5,86.5)
  Mid-Layer 1 w0.2: v1(77.5,86.5) 78.1,87.1 84.7,87.1 86.2,85.6 87.2,85.6 88.227,86.627 89.408,86.627 90.47,85.565 OutCon1.B17
FCO_1_N: OutCon1.B20 U5.21 | length 30.8
  Top Layer w0.2: U5.21 79.2,99.2 v1(80,100)
  Bottom Layer w0.2: v1(80,100) 79.5,99.5 79.5,98.5 80,98 80,97 79.5,96.5 79.5,96 80,95.5 80,94.5 79.5,94 79.5,93.25 79.7,93.05 79.7,91.95 79.5,91.75 79.5,91 81.225,89.275 81.225,87.775 82.175,86.825 83.675,86.825 84.9,85.6 87.2,85.6 88.5,84.3 89.1,84.3 90.702,82.698 OutCon1.B20
FCO_1_P: OutCon1.B19 U5.22 | length 30.8
  Top Layer w0.2: U5.22 78.2,99.7 v1(79,100.5)
  Bottom Layer w0.2: v1(79,100.5) 79.5,101 80.5,101 81,100.5 81,90.5 83.4,88.1 87.2,88.1 88.5,86.8 89.1,86.8 90.3,85.6 91,85.6 92.607,83.993 OutCon1.B19
FCO_2_N: OutCon1.B22 U6.21 | length 18.2
  Top Layer w0.2: U6.21 79.2,83.7 v1(80,84.5)
  Bottom Layer w0.2: v1(80,84.5) 82,84.5 82.25,84.25 82.25,83.95 82.45,83.75 82.75,83.75 83,83.5 83,83.125 82.8,82.925 82.8,82.575 83,82.375 83,82 83.5,81.5 85,81.5 86,80.5 87.2,80.5 88.485,79.215 OutCon1.B22
FCO_2_P: OutCon1.B21 U6.22 | length 18.9
  Top Layer w0.2: U6.22 78.2,84.2 v1(79,85)
  Bottom Layer w0.2: v1(79,85) 79.357,85.357 83.143,85.357 85.5,83 87.2,83 88.5,81.7 89.2,81.7 90.4,80.5 OutCon1.B21@92.607,80.5
GND: C1.1 C2.1 C3.1 C4.1 C5.1 C18.2 C19.1 C20.2 C21.1 C22.2 C23.1 C24.2 C25.1 C26.1 C27.1 C28.1 C29.1 C42.2 C43.1 C44.2 C45.1 C46.2 C47.1 C48.2 C49.1 C50.1 C51.1 C52.1 C53.1 C54.1 C55.1 C56.1 C57.1 C60.2 C62.1 C63.2 C65.1 C66.1 C67.1 C68.1 C69.1 C70.1 C71.1 C72.1 C73.1 C74.1 C75.1 C76.1 C77.1 C78.1 C79.1 C80.1 C81.1 C82.1 C83.1 Csup1.2 Csup2.+ Csup3.2 InCon_1.6 InCon_1.7 InCon_1.8 InCon_1.9 InCon_1.10 InCon_2.6 InCon_2.7 InCon_2.8 InCon_2.9 InCon_2.10 OutCon1.B4 OutCon1.B6 OutCon1.B8 OutCon1.B10 OutCon1.B12 OutCon1.B14 R65.2 R66.2 R70.2 R74.2 Rref1.2 U1.25 U2.25 U3.25 U4.25 U5.0 U5.11 U5.26 U5.41 U6.0 U6.11 U6.26 U6.41 Usup2.4 | length 25.1
  Top Layer w0.2: U6.41 72,83.2 U6.0 ; U5.41 72,98.7 U5.0 ; U6.11 75,80.2 U6.0 ; U6.26 75,84.7 U6.0 ; U5.11 75,95.7 U5.0 ; U5.26 75,100.2 U5.0
  other v3: 57.8,57 57.8,65 71,80.7 74.5,80.7 72.8,82.5 71,84.2 74.5,84.2 71,96.2 74.5,96.2 72.8,98 71,99.7 74.5,99.7 80.5,102.5 57.8,115.5 57.8,123.5
  other v5: 55,43 75,43 35,80 55,80 35,100 55,100 55,137 75,137
  other v6: 57,91
INPUT_CH1+: C6.1 InCon_1.4 | length 6.1
  Top Layer w0.175: InCon_1.4 42.8,126.5 C6.1
INPUT_CH1-: C7.1 InCon_1.14 | length 11.2
  Top Layer w0.175: InCon_1.14 37.2,122.7 38.365,121.535 39.931,121.535 42.896,124.5 C7.1
INPUT_CH2+: C8.1 InCon_1.3 | length 5.4
  Top Layer w0.175: InCon_1.3 40.701,120.4 42.801,122.5 C8.1
INPUT_CH2-: C9.1 InCon_1.13 | length 10.5
  Top Layer w0.175: InCon_1.13 37.2,120.4 38.365,119.235 41.441,119.235 42.706,120.5 C9.1
INPUT_CH3+: C10.1 InCon_1.2 | length 4.7
  Top Layer w0.175: InCon_1.2 41.45,118.1 41.85,118.5 C10.1
INPUT_CH3-: C11.1 InCon_1.12 | length 10.2
  Top Layer w0.175: InCon_1.12@33.96,118.1 37.2,118.1 38.365,116.935 40.891,116.935 41.326,116.5 C11.1
INPUT_CH4+: C12.1 InCon_1.1 | length 5
  Top Layer w0.175: InCon_1.1 40.121,115.8 41.421,114.5 C12.1
INPUT_CH4-: C13.1 InCon_1.11 | length 10.9
  Top Layer w0.175: InCon_1.11@33.96,115.8 37.2,115.8 38.365,114.635 39,114.635 41.135,112.5 C13.1
INPUT_CH5+: C30.1 InCon_2.4 | length 7.1
  Top Layer w0.175: InCon_2.4 42,66.05 42,67 43,68 C30.1
INPUT_CH5-: C31.1 InCon_2.14 | length 12.3
  Top Layer w0.175: InCon_2.14 37.2,63.05 38.365,61.885 39.885,61.885 42.5,64.5 42.5,65.5 43,66 C31.1
INPUT_CH6+: C32.1 InCon_2.3 | length 5.8
  Top Layer w0.175: InCon_2.3 39.75,60.75 43,64 C32.1
INPUT_CH6-: C33.1 InCon_2.13 | length 11
  Top Layer w0.175: InCon_2.13 37.2,60.75 38.365,59.585 40.585,59.585 43,62 C33.1
INPUT_CH7+: C34.1 InCon_2.2 | length 5.1
  Top Layer w0.175: InCon_2.2 41.45,58.45 43,60 C34.1
INPUT_CH7-: C35.1 InCon_2.12 | length 10.3
  Top Layer w0.175: InCon_2.12@33.96,58.45 37.2,58.45 38.365,57.285 42.285,57.285 43,58 C35.1
INPUT_CH8+: C36.1 InCon_2.1 | length 4.6
  Top Layer w0.175: InCon_2.1 42.85,56.15 43,56 C36.1
INPUT_CH8-: C37.1 InCon_2.11 | length 10.4
  Top Layer w0.175: InCon_2.11@33.96,56.15 37.2,56.15 39.35,54 C37.1
NetC6_2: C6.2 R1.2 R9.2 | length 3.7
  Top Layer w0.2: C6.2@45.532,126.5 45.786,126.5 v2(46.5,126.5) R9.2
  Bottom Layer w0.2: R1.2@45.5,126.5 45.532,126.5 45.786,126.5 v2(46.5,126.5)
NetC7_2: C7.2 R2.1 R10.2 | length 3.3
  Top Layer w0.2: C7.2@45.532,124.5 v2(46.1,124.5) R10.2
  Bottom Layer w0.2: R2.1 v2(46.1,124.5)
NetC8_2: C8.2 R3.2 R11.2 | length 3.7
  Top Layer w0.2: C8.2@45.532,122.5 v2(46.5,122.5) R11.2
  Bottom Layer w0.2: R3.2@45.5,122.5 45.532,122.5 45.786,122.5 v2(46.5,122.5)
NetC9_2: C9.2 R4.1 R12.2 | length 3.3
  Top Layer w0.2: C9.2@45.532,120.5 47,120.5 R12.2
  Bottom Layer w0.2: R4.1 v2(46.1,120.5)
NetC10_2: C10.2 R5.2 R13.2 | length 3.7
  Top Layer w0.2: C10.2@45.532,118.5 45.786,118.5 v2(46.5,118.5) R13.2
  Bottom Layer w0.2: R5.2@45.5,118.5 45.532,118.5 45.786,118.5 v2(46.5,118.5)
NetC11_2: C11.2 R6.1 R14.2 | length 3.3
  Top Layer w0.2: C11.2@45.532,116.5 47,116.5 R14.2
  Bottom Layer w0.2: R6.1 v2(46.1,116.5)
NetC12_2: C12.2 R7.2 R15.2 | length 3.7
  Top Layer w0.2: C12.2@45.532,114.5 45.786,114.5 v2(46.5,114.5) R15.2
  Bottom Layer w0.2: R7.2@45.5,114.5 45.532,114.5 45.786,114.5 v2(46.5,114.5)
NetC13_2: C13.2 R8.1 R16.2 | length 3.5
  Top Layer w0.2: C13.2 47,112.5 R16.2
  Bottom Layer w0.2: R8.1 v2(46.1,112.5)
NetC30_2: C30.2 R33.2 R41.2 | length 3.9
  Top Layer w0.2: C30.2@45.532,68 45.786,68 v2(46.532,68) R41.2
  Bottom Layer w0.2: R33.2 v2(46.532,68)
NetC31_2: C31.2 R34.1 R42.2 | length 3.5
  Top Layer w0.2: C31.2 47,66 R42.2
  Bottom Layer w0.2: R34.1 v2(46.1,66)
NetC32_2: C32.2 R35.2 R43.2 | length 4.1
  Top Layer w0.2: C32.2 46.5,64 R43.2
  Bottom Layer w0.2: R35.2 v2(46.532,64)
NetC33_2: C33.2 R36.1 R44.2 | length 3.3
  Top Layer w0.2: C33.2@45.532,62 47,62 ; 47.032,62 R44.2@48.232,62
  Bottom Layer w0.2: R36.1 v2(46.1,62)
NetC34_2: C34.2 R37.2 R45.2 | length 3.7
  Top Layer w0.2: C34.2@45.532,60 45.786,60 v2(46.532,60) R45.2
  Bottom Layer w0.2: R37.2@45.532,60 45.786,60 v2(46.532,60)
NetC35_2: C35.2 R38.1 R46.2 | length 3.3
  Top Layer w0.2: C35.2@45.532,58 47,58 ; 47.032,58 R46.2@48.232,58
  Bottom Layer w0.2: R38.1 v2(46.1,58)
NetC36_2: C36.2 R39.2 R47.2 | length 3.7
  Top Layer w0.2: C36.2@45.532,56 45.786,56 v2(46.532,56) R47.2
  Bottom Layer w0.2: R39.2@45.532,56 45.786,56 v2(46.532,56)
NetC37_2: C37.2 R40.1 R48.2 | length 3.3
  Top Layer w0.2: C37.2@45.532,54 47,54 R48.2
  Bottom Layer w0.2: R40.1 v2(46.1,54)
NetC58_+: C58.1 C61.1 C62.2 U5.44 | length 9.7
  Top Layer w0.2: v1(67.5,97.4) 68.3,97.4 68.5,97.2 U5.44
  Bottom Layer w0.2: C62.2 C61.1 63.3,95.7 65.7,95.7 67.4,97.4 v1(67.5,97.4)
NetC58_-: C58.2 C60.1 C61.2 U5.43 | length 10.4
  Top Layer w0.2: v1(66.5,97.8) 66.8,98.1 68.2,98.1 68.6,97.7 U5.43
  Bottom Layer w0.2: C60.1 C61.2 63.4,99.2 66,99.2 66.5,98.7 v1(66.5,97.8)
NetC59_+: C59.1 C64.1 C65.2 U6.44 | length 9.7
  Top Layer w0.2: v1(67.5,81.9) 68.3,81.9 68.5,81.7 U6.44
  Bottom Layer w0.2: C65.2 C64.1 63.3,80.2 65.8,80.2 v1(67.5,81.9)
NetC59_-: C59.2 C63.1 C64.2 U6.43 | length 10.4
  Top Layer w0.2: v1(66.5,82.3) 66.8,82.6 68.2,82.6 68.6,82.2 U6.43
  Bottom Layer w0.2: C63.1 C64.2 63.4,83.7 66,83.7 66.5,83.2 v1(66.5,82.3)
NetC84_1: C84.1 R67.1 Usup2.1 | length 5.6
  Top Layer w0.2: Usup2.1 46,94 47.5,95.5 C84.1 R67.1
NetC84_2: C84.2 R68.1 Usup2.2 | length 5.4
  Top Layer w0.2: Usup2.2 44.73,95.53 C84.2 R68.1
NetC85_1: C85.1 R71.1 Usup2.7 | length 6.6
  Top Layer w0.2: Usup2.7 44.73,87.77 45.7,86.8 46.7,86.8 47.49,86.01 R71.1
NetC85_2: C85.2 R72.1 Usup2.6 | length 6.5
  Top Layer w0.2: Usup2.6 43.46,86.54 44.5,85.5 C85.2 R72.1@45.7,83
NetR9_1: R9.1 R17.1 U1.24 | length 6.9
  Top Layer w0.2: R9.1 51.644,126.5 52,126.144 52.544,125.6 56.4,125.6 U1.24
NetR10_1: R10.1 R18.2 U1.1 | length 6.6
  Top Layer w0.2: R10.1 50.6,124.5 50.9,124.2 51.468,124.2 51.468,124.556 52.012,125.1 55.4,125.1 U1.1
NetR11_1: R11.1 R19.1 U1.6 | length 6.6
  Top Layer w0.2: R11.1 50.6,122.5 50.9,122.8 51.214,122.8 51.468,122.8 51.468,122.476 52.044,121.9 55.4,121.9 U1.6
NetR12_1: R12.1 R20.2 U1.7 | length 7.1
  Top Layer w0.2: R12.1 51.746,120.5 52,120.5 52,120.856 52,120.9 52.5,121.4 56.4,121.4 U1.7
NetR13_1: R13.1 R21.1 U2.24 | length 6.9
  Top Layer w0.2: R13.1 51.644,118.5 52,118.144 52.544,117.6 56.4,117.6 U2.24
NetR14_1: R14.1 R22.2 U2.1 | length 6.6
  Top Layer w0.2: R14.1 50.6,116.5 50.9,116.2 51.5,116.2 51.5,116.588 52.012,117.1 55.4,117.1 U2.1
NetR15_1: R15.1 R23.1 U2.6 | length 6.6
  Top Layer w0.2: R15.1 50.6,114.5 50.9,114.8 51.214,114.8 51.468,114.8 51.468,114.476 52.044,113.9 55.4,113.9 U2.6
NetR16_1: R16.1 R24.2 U2.7 | length 7.1
  Top Layer w0.2: R16.1 51.746,112.5 52,112.5 52,112.856 52,112.9 52.5,113.4 56.4,113.4 U2.7
NetR17_2: R17.2 U1.23 | length 4.3
  Top Layer w0.2: R17.2@53.444,126.5 56.5,126.5 57,126 U1.23
NetR18_1: R18.1 U1.2 | length 2.3
  Top Layer w0.2: R18.1 53.55,124.25 U1.2
NetR19_2: R19.2 U1.5 | length 2.3
  Top Layer w0.2: R19.2 53.55,122.75 U1.5
NetR20_1: R20.1 U1.8 | length 4.2
  Top Layer w0.2: R20.1 56.5,120.5 57,121 U1.8
NetR21_2: R21.2 U2.23 | length 4.2
  Top Layer w0.2: R21.2 56.5,118.5 57,118 U2.23
NetR22_1: R22.1 U2.2 | length 2.3
  Top Layer w0.2: R22.1 53.55,116.25 U2.2
NetR23_2: R23.2 U2.5 | length 2.3
  Top Layer w0.2: R23.2 53.55,114.75 U2.5
NetR24_1: R24.1 U2.8 | length 4.2
  Top Layer w0.2: R24.1 56.5,112.5 57,113 U2.8
NetR25_1: R25.1 U1.19 | length 24.7
  Top Layer w0.2: U1.19 68,125.5 74.5,119 R25.1
NetR26_1: R26.1 U1.18 | length 22.3
  Top Layer w0.2: U1.18 60,125 64,125 67,125 73,119 R26.1
NetR27_1: R27.1 U1.13 | length 19.6
  Top Layer w0.2: U1.13 68.25,122.25 71.5,119 R27.1
NetR28_1: R28.1 U1.12 | length 18.5
  Top Layer w0.2: U1.12 67.5,121.5 70,119 R28.1
NetR29_1: R29.1 U2.19 | length 12.5
  Top Layer w0.2: U2.19 65.5,117.5 68,115 R29.1
NetR30_1: R30.1 U2.18 | length 10.2
  Top Layer w0.2: U2.18 60,117 64.5,117 66.5,115 R30.1
NetR31_1: R31.1 U2.13 | length 6.6
  Top Layer w0.2: U2.13 64.25,114.25 65,113.5 R31.1
NetR32_1: R32.1 U2.12 | length 5.2
  Top Layer w0.2: U2.12 63,113.5 63.5,113 R32.1
NetR41_1: R41.1 R49.1 U3.24 | length 6.9
  Top Layer w0.2: R41.1 51.644,68 52,67.644 52.544,67.1 56.4,67.1 U3.24
NetR42_1: R42.1 R50.2 U3.1 | length 6.6
  Top Layer w0.2: R42.1 50.6,66 50.9,65.7 51.468,65.7 51.468,66.056 52.012,66.6 55.4,66.6 U3.1
NetR43_1: R43.1 R51.1 U3.6 | length 6.6
  Top Layer w0.2: R43.1 50.6,64 50.9,64.3 51.214,64.3 51.468,64.3 51.468,63.976 52.044,63.4 55.4,63.4 U3.6
NetR44_1: R44.1 R52.2 U3.7 | length 7.1
  Top Layer w0.2: R44.1 51.746,62 52,62 52,62.356 52,62.4 52.5,62.9 56.4,62.9 U3.7
NetR45_1: R45.1 R53.1 U4.24 | length 6.9
  Top Layer w0.2: R45.1 51.644,60 52,59.644 52.544,59.1 56.4,59.1 U4.24
NetR46_1: R46.1 R54.2 U4.1 | length 6.6
  Top Layer w0.2: R46.1 50.6,58 50.9,57.7 51.5,57.7 51.5,58.088 52.012,58.6 55.4,58.6 U4.1
NetR47_1: R47.1 R55.1 U4.6 | length 6.6
  Top Layer w0.2: R47.1 50.6,56 50.9,56.3 51.214,56.3 51.468,56.3 51.468,55.976 52.044,55.4 55.4,55.4 U4.6
NetR48_1: R48.1 R56.2 U4.7 | length 7.1
  Top Layer w0.2: R48.1 51.746,54 52,54 52,54.356 52,54.4 52.5,54.9 56.4,54.9 U4.7
NetR49_2: R49.2 U3.23 | length 4.2
  Top Layer w0.2: R49.2 56.5,68 57,67.5 U3.23
NetR50_1: R50.1 U3.2 | length 2.3
  Top Layer w0.2: R50.1 53.55,65.75 U3.2
NetR51_2: R51.2 U3.5 | length 2.3
  Top Layer w0.2: R51.2 53.55,64.25 U3.5
NetR52_1: R52.1 U3.8 | length 4.2
  Top Layer w0.2: R52.1 56.5,62 57,62.5 U3.8
NetR53_2: R53.2 U4.23 | length 4.2
  Top Layer w0.2: R53.2 56.5,60 57,59.5 U4.23
NetR54_1: R54.1 U4.2 | length 2.3
  Top Layer w0.2: R54.1 53.55,57.75 U4.2
NetR55_2: R55.2 U4.5 | length 2.3
  Top Layer w0.2: R55.2 53.55,56.25 U4.5
NetR56_1: R56.1 U4.8 | length 4.2
  Top Layer w0.2: R56.1 56.5,54 57,54.5 U4.8
NetR57_1: R57.1 U3.19 | length 5.2
  Top Layer w0.2: U3.19 63,67 63.5,67.5 R57.1
NetR58_1: R58.1 U3.18 | length 6.6
  Top Layer w0.2: U3.18 60,66.5 64.5,66.5 65,67 R58.1
NetR59_1: R59.1 U3.13 | length 10
  Top Layer w0.2: U3.13 64.75,63.75 66.5,65.5 R59.1
NetR60_1: R60.1 U3.12 | length 12.5
  Top Layer w0.2: U3.12 65.5,63 68,65.5 R60.1
NetR61_1: R61.1 U4.19 | length 18.5
  Top Layer w0.2: U4.19 67.5,59 70,61.5 R61.1
NetR62_1: R62.1 U4.18 | length 19.6
  Top Layer w0.2: U4.18 60,58.5 68.5,58.5 71.5,61.5 R62.1
NetR63_1: R63.1 U4.13 | length 22.1
  Top Layer w0.2: U4.13 67.25,55.75 73,61.5 R63.1
NetR64_1: R64.1 U4.12 | length 24.7
  Top Layer w0.2: U4.12 68,55 74.5,61.5 R64.1
NetR65_1: R65.1 U5.40 | length 6.6
  Top Layer w0.2: R65.1 63.8,99.2 U5.40
NetR66_1: R66.1 U6.40 | length 6.6
  Top Layer w0.2: R66.1 63.8,83.7 U6.40
NetRref1_1: Rref1.1 Rref2.2 Usup1.1 | length 5.4
  Top Layer w0.4: Rref2.2 Rref1.1 76.4,124.5 Usup1.1
OUTPUT_CH1_N: OutCon1.A5 U5.19 | length 13.7
  Top Layer w0.2: U5.19 82,98.2 84.605,100.805 OutCon1.A5
OUTPUT_CH1_P: OutCon1.A4 U5.20 | length 12.1
  Top Layer w0.2: U5.20 81.5,98.7 84.875,102.075 OutCon1.A4
OUTPUT_CH2_N: OutCon1.A7 U5.17 | length 13
  Top Layer w0.2: U5.17 83,97.2 84.065,98.265 OutCon1.A7
OUTPUT_CH2_P: OutCon1.A6 U5.18 | length 11.5
  Top Layer w0.2: U5.18 82.5,97.7 84.335,99.535 OutCon1.A6
OUTPUT_CH3_N: OutCon1.A9 U5.15 | length 12.8
  Top Layer w0.2: U5.15 82.5,96.2 82.975,95.725 OutCon1.A9
OUTPUT_CH3_P: OutCon1.A8 U5.16 | length 10.8
  Top Layer w0.2: U5.16 83.5,96.7 83.795,96.995 OutCon1.A8
OUTPUT_CH4_N: OutCon1.A11 U5.13 | length 13.4
  Top Layer w0.2: U5.13 81.5,95.2 83.515,93.185 OutCon1.A11
OUTPUT_CH4_P: OutCon1.A10 U5.14 | length 11.2
  Top Layer w0.2: U5.14 82,95.7 83.245,94.455 OutCon1.A10
OUTPUT_CH5_N: OutCon1.A13 U6.19 | length 18.8
  Top Layer w0.2: U6.19 80.2,82.7 81.5,84 81.5,89 83.145,90.645 OutCon1.A13
OUTPUT_CH5_P: OutCon1.A12 U6.20 | length 17.5
  Top Layer w0.2: U6.20 79.7,83.2 81,84.5 81,90 82.915,91.915 OutCon1.A12
OUTPUT_CH6_N: OutCon1.A15 U6.17 | length 17.3
  Top Layer w0.2: U6.17 81.2,81.7 82.5,83 82.5,86.5 84.105,88.105 OutCon1.A15
OUTPUT_CH6_P: OutCon1.A14 U6.18 | length 16
  Top Layer w0.2: U6.18 80.7,82.2 82,83.5 82,87.5 83.875,89.375 OutCon1.A14
OUTPUT_CH7_N: OutCon1.A17 U6.15 | length 15.8
  Top Layer w0.2: U6.15 82.2,80.7 83.5,82 83.5,84 85.065,85.565 OutCon1.A17
OUTPUT_CH7_P: OutCon1.A16 U6.16 | length 14.5
  Top Layer w0.2: U6.16 81.7,81.2 83,82.5 83,85 84.835,86.835 OutCon1.A16
OUTPUT_CH8_N: OutCon1.A19 U6.13 | length 14.3
  Top Layer w0.2: U6.13 83.2,79.7 84.5,81 84.5,81.5 86.025,83.025 OutCon1.A19
OUTPUT_CH8_P: OutCon1.A18 U6.14 | length 13
  Top Layer w0.2: U6.14 82.7,80.2 84,81.5 84,82.5 85.795,84.295 OutCon1.A18
SCLK: OutCon1.A3 U5.28 U6.28 | length 46.8
  Top Layer w0.2: U6.28 74,87 v1(74.2,87.2) ; U5.28 74,102.5 v1(74.2,102.7) 74.2,105.2 75.5,106.5 80,106.5 83.155,103.345 OutCon1.A3
  Mid-Layer 2 w0.2: v1(74.2,87.2) 83,96 83,102.5 83.845,103.345 OutCon1.A3
  other v1: 74.2,102.7
SDIO/ODM: OutCon1.A2 U5.29 U6.29 | length 45.6
  Top Layer w0.2: U6.29 v1(73.5,88) ; U5.29 v1(73.5,103.5) 73.5,105.5 75,107 84.507,107 OutCon1.A2
  Mid-Layer 2 w0.2: v1(73.5,88) 82,96.5 82,103.5 83.115,104.615 OutCon1.A2
UDIFF_CH1_N: C18.1 R25.2 U5.34 | length 13.2
  Top Layer w0.2: U5.34 71,102 70.5,102.5 70.5,105 71,105.5 v1(71.5,105.5) ; v4(74.5,109) R25.2
  Bottom Layer w0.2: v1(71.5,105.5) 74.5,108.5 v4(74.5,109) C18.1
UDIFF_CH1_P: C19.2 R26.2 U5.33 | length 12.7
  Top Layer w0.2: v1(71.25,104.25) 71,104 71,102.7 71.5,102.2 U5.33 ; v4(73,109) R26.2
  Bottom Layer w0.2: v1(71.25,104.25) 70.5,105 70.5,106 73,108.5 v4(73,109) C19.2
UDIFF_CH2_N: C20.1 R27.2 U5.37 | length 13.3
  Top Layer w0.2: U5.37 68.5,101.494 68.5,106 v4(71.5,109) R27.2
  Bottom Layer w0.2: v4(71.5,109) C20.1
UDIFF_CH2_P: C21.2 R28.2 U5.38 | length 13.8
  Top Layer w0.2: U5.38 69.219,100.275 68.868,100.275 68,101.143 68,107 v4(70,109) R28.2
  Bottom Layer w0.2: v4(70,109) C21.2
UDIFF_CH3_N: C22.1 R29.2 U5.48 | length 21.1
  Top Layer w0.2: v1(67.5,95) 67.7,95.2 U5.48 ; v4(68,109) R29.2
  Mid-Layer 1 w0.2: v1(67.5,95) 65.6,96.9 65.6,106.6 v4(68,109)
  Bottom Layer w0.2: v4(68,109) C22.1
UDIFF_CH3_P: C23.2 R30.2 U5.47 | length 22
  Top Layer w0.2: v1(66,95) 66.7,95.7 U5.47 ; v4(66.5,109) R30.2
  Mid-Layer 1 w0.2: v1(66,95) 65,96 65,107.5 v4(66.5,109)
  Bottom Layer w0.2: v4(66.5,109) C23.2
UDIFF_CH4_N: C24.1 R31.2 U5.3 | length 27.3
  Top Layer w0.2: v4(65,109) R31.2 ; v1(69.5,93) 70,93 71,94 U5.3
  Mid-Layer 1 w0.2: v4(65,109) 64,108 64,95 64.5,94.5 65,94.5 65.5,94 65.5,93.5 66,93 66.875,93 67.375,93.5 68.125,93.5 68.625,93 v1(69.5,93)
  Bottom Layer w0.2: v4(65,109) C24.1
UDIFF_CH4_P: C25.2 R32.2 U5.4 | length 28.4
  Top Layer w0.2: v4(63.5,109) R32.2 ; v1(70.5,92.5) 70.5,92.8 71.5,93.8 U5.4
  Mid-Layer 1 w0.2: v4(63.5,109) 63.5,94.5 65.8,92.2 70.2,92.2 v1(70.5,92.5)
  Bottom Layer w0.2: v4(63.5,109) C25.2
UDIFF_CH5_N: C42.1 R57.2 U6.34 | length 27.6
  Top Layer w0.2: R57.2 v4(63.5,71.5) ; v1(69.5,88.5) 70.1,87.9 70.1,87.4 71,86.5 U6.34
  Mid-Layer 1 w0.2: v4(63.5,71.5) 63.5,85 67,88.5 v1(69.5,88.5)
  Bottom Layer w0.2: C42.1 v4(63.5,71.5)
UDIFF_CH5_P: C43.2 R58.2 U6.33 | length 28
  Top Layer w0.2: R58.2 v4(65,71.5) ; v1(70.8,88.5) 70.8,87.4 71.5,86.7 U6.33
  Mid-Layer 1 w0.2: v4(65,71.5) 65,78 64,79 64,84.3 67.4,87.7 70,87.7 v1(70.8,88.5)
  Bottom Layer w0.2: C43.2 v4(65,71.5)
UDIFF_CH6_N: C44.1 R59.2 U6.37 | length 22.4
  Top Layer w0.2: R59.2 v4(66.5,71.5) ; v1(67.5,86.5) 67.994,86.5 U6.37
  Mid-Layer 1 w0.2: v4(66.5,71.5) 66.5,78 65,79.5 65,84 v1(67.5,86.5)
  Bottom Layer w0.2: C44.1 v4(66.5,71.5)
UDIFF_CH6_P: C45.2 R60.2 U6.38 | length 21.4
  Top Layer w0.2: v1(67.5,85.5) 68,85.5 68.8,84.7 U6.38 ; R60.2 v4(68,71.5)
  Mid-Layer 1 w0.2: v1(67.5,85.5) 65.5,83.5 65.5,80 68,77.5 v4(68,71.5)
  Bottom Layer w0.2: C45.2 v4(68,71.5)
UDIFF_CH7_N: C46.1 R61.2 U6.48 | length 15
  Top Layer w0.2: v1(67.5,79.3) 67.9,79.7 U6.48 ; R61.2 v4(70,71.5)
  Bottom Layer w0.2: v1(67.5,79.3) 67,78.8 67,76.5 70.5,73 70.5,72 v4(70,71.5) C46.1
UDIFF_CH7_P: C47.2 R62.2 U6.47 | length 15.7
  Top Layer w0.2: v1(67.5,80.2) U6.47 ; R62.2 v4(71.5,71.5)
  Bottom Layer w0.2: v1(67.5,80.2) 67.8,80.2 68.2,79.8 68.2,76.3 71.5,73 v4(71.5,71.5) C47.2
UDIFF_CH8_N: C48.1 R63.2 U6.3 | length 12.5
  Top Layer w0.2: U6.3 71,78.3 70.6,77.9 70.6,76.4 73.5,73.5 73.5,72 v4(73,71.5) R63.2
  Bottom Layer w0.2: C48.1 v4(73,71.5)
UDIFF_CH8_P: C49.2 R64.2 U6.4 | length 12.5
  Top Layer w0.2: U6.4 71.5,78.1 71.1,77.7 71.1,76.9 74.5,73.5 v4(74.5,71.5) R64.2
  Bottom Layer w0.2: C49.2 v4(74.5,71.5)
VCM: C1.2 C2.2 C3.2 C4.2 C5.2 C14.1 C15.1 C16.1 C17.1 C26.2 C27.2 C28.2 C29.2 C38.1 C39.1 C40.1 C41.1 R2.2 R4.2 R6.2 R8.2 R34.2 R36.2 R38.2 R40.2 R67.2 R68.2 R71.2 R72.2 U1.11 U1.17 U2.11 U2.17 U3.11 U3.17 U4.11 U4.17 | length 180.6
  Top Layer w0.2: U4.11 58.5,54 v2(59,53.5) ; U3.11 58.5,62 v2(59,61.5) ; U2.11 58.5,112.5 v2(59,112) ; U1.11 58.5,120.5 v2(59,120) ; U4.17 61.75,57.75 v2(62,57.5) ; U3.17 61.75,65.75 v2(62,65.5) ; U2.17 61.75,116.25 v2(62,116) ; U1.17 61.75,124.25 v2(62,124)
  Top Layer w0.5: 43.9,100.3 R68.2 R67.2 49.5,100.3 v3(50.5,101.3) ; 44,81.2 R72.2 R71.2 49.3,81.2 v3(50.5,80)
  Bottom Layer w0.2: R40.2 C41.1 50.5,54 ; R38.2 C40.1 50.5,58 ; R36.2 C39.1 50.5,62 ; R34.2 C38.1 50.5,66 ; R8.2 C17.1 50.5,112.5 ; R6.2 C16.1 50.5,116.5 ; R4.2 C15.1 50.5,120.5 ; R2.2 C14.1 50.5,124.5 ; v3@50.5,53 51,52.5 58,52.5 v2(59,53.5) 60.5,53.5 62,55 v2(62,57.5) ; 50.5,56 C29.2 ; 50.5,60 C28.2 ; 50.5,61 58.5,61 v2(59,61.5) 60.5,61.5 62,63 v2(62,65.5) ; 50.5,64 C27.2 ; 50.5,68 C26.2 ; 50.5,111.5 58.5,111.5 v2(59,112) 60.5,112 62,113.5 v2(62,116) ; 50.5,114.5 C5.2 ; 50.5,118.5 C4.2 ; 50.5,119.5 58.5,119.5 v2(59,120) 60.5,120 62,121.5 v2(62,124) ; 50.5,122.5 C3.2 ; 50.5,126.5 C2.2
  Bottom Layer w0.4: 50.7,110 C1.2
  Bottom Layer w0.5: v3(50.5,52.5) 50.5,53 50.5,56 50.5,60 50.5,61 50.5,64 50.5,68 v3(50.5,80) ; v3(50.5,101.3) 50.5,111.5 50.5,114.5 50.5,118.5 50.5,119.5 50.5,122.5 50.5,124.5 50.5,126.5 v3(50.5,128)
VOFFSET+: C14.2 C15.2 C16.2 C17.2 C38.2 C39.2 C40.2 C41.2 R1.1 R3.1 R5.1 R7.1 R33.1 R35.1 R37.1 R39.1 R70.1 R74.1 | length 122.3
  Top Layer w0.4: v3(42,80.5) R74.1 44,83 ; v3(42,102) R70.1 42,99 42.5,98.5 43.9,98.5
  Bottom Layer w0.2: 42,56.5 42.5,56 R39.1 43.5,55.5 44,55 47,55 47.8,55.8 C41.2 ; 42,60 R37.1 43.5,59.5 44,59 47,59 47.8,59.8 C40.2 ; 42,64 R35.1 43.5,63.5 44,63 47,63 47.8,63.8 C39.2 ; 42,68 R33.1 43.5,67.5 44,67 47,67 47.8,67.8 C38.2 ; 42,114.5 R7.1 43.5,114 44,113.5 47,113.5 47.8,114.3 C17.2 ; 42,118.5 R5.1 43.5,118 44,117.5 47,117.5 47.8,118.3 C16.2 ; 42,122.5 R3.1 43.5,122 44,121.5 47,121.5 47.8,122.3 C15.2 ; 42,126 42.5,126.5 R1.1 43.5,126 44,125.5 47,125.5 47.8,126.3 C14.2
  Bottom Layer w0.5: 42,56.5 42,60 42,64 42,68 v3(42,80.5) ; v3(42,102) 42,114.5 42,118.5 42,122.5 42,126
VREF: C66.2 C67.2 C68.2 C69.2 U5.42 U6.42 Usup2.3 Usup2.5 | length 66.3
  Top Layer w0.2: Usup2.5 42.19,89.39 42.8,90 51,90 59.1,81.9 63,81.9 ; Usup2.3 43.46,92.04 44,91.5 51,91.5 56.9,97.4 63,97.4 ; C69.2 63,81.9 ; C68.2 63,97.4 ; U6.42 68.7,82.7 68.3,83.1 65.8,83.1 65.5,82.8 C67.2 63,81.9 ; U5.42 68.7,98.2 68.3,98.6 65.8,98.6 65.5,98.3 C66.2 63,97.4
pads on no net: InCon_1.15 InCon_1.16 InCon_1.17 InCon_2.15 InCon_2.16 InCon_2.17 OutCon1.27 OutCon1.28 OutCon1.A25 OutCon1.A26 OutCon1.B2 OutCon1.B5 OutCon1.B7 OutCon1.B9 OutCon1.B11 OutCon1.B13 OutCon1.B24 OutCon1.B26 R69.1 R69.2 R73.1 R73.2 U1.14 U1.20 U2.14 U2.20 U3.14 U3.20 U4.14 U4.20 U5.31 U6.31

## Polygon pours and split planes (outlines as drawn)
GND on Bottom Layer "GND" (hatched Horizontal grid 0.15 track 0.2, remove dead copper, pour order 4): 25,140 95,140 95,40 25,40
GND on Top Layer "GND" (hatched 90Degree grid 0.15 track 0.2, remove dead copper, pour order 3): 24.5,139.5 94.5,139.5 94.5,39.5 24.5,39.5

## Keep-outs
Keep-Out Layer:
  lines w0.508: 25,40 25,140 95,140 95,40 25,40

## Silkscreen, mask and mechanical layers (free items; w line width, h text height)
Top Solder:
  lines w0.254: 25,40 25,140 95,140 95,40 25,40
Bottom Solder:
  lines w0.254: 25,40 25,140 95,140 95,40 25,40

## Text inside footprints (layer, text, board x,y; h text height)
C1: Mechanical 3 "CHIP1206" at 55.4,108.476 h0.51
C2: Mechanical 3 "CHIP0603" at 54.5,127.5 h0.5
C3: Mechanical 3 "CHIP0603" at 54.5,123.5 h0.5
C4: Mechanical 3 "CHIP0603" at 54.5,119.5 h0.5
C5: Mechanical 3 "CHIP0603" at 54.5,115.5 h0.5
C6: Mechanical 3 "CHIP0603" at 42.5,127.5 h0.5
C7: Mechanical 3 "CHIP0603" at 42.5,125.5 h0.5
C8: Mechanical 3 "CHIP0603" at 42.5,123.5 h0.5
C9: Mechanical 3 "CHIP0603" at 42.5,121.5 h0.5
C10: Mechanical 3 "CHIP0603" at 42.5,119.5 h0.5
C11: Mechanical 3 "CHIP0603" at 42.5,117.5 h0.5
C12: Mechanical 3 "CHIP0603" at 42.5,115.5 h0.5
C13: Mechanical 3 "CHIP0603" at 42.5,113.5 h0.5
C14: Mechanical 3 "CHIP0603" at 50,123.5 h0.5 r270
C15: Mechanical 3 "CHIP0603" at 50,119.5 h0.5 r270
C16: Mechanical 3 "CHIP0603" at 50,115.5 h0.5 r270
C17: Mechanical 3 "CHIP0603" at 50,111.5 h0.5 r270
C18: Mechanical 3 "CHIP0603" at 75.5,109.7 h0.5 r270
C19: Mechanical 3 "CHIP0603" at 72,113.5 h0.5 r90
C20: Mechanical 3 "CHIP0603" at 72.5,109.7 h0.5 r270
C21: Mechanical 3 "CHIP0603" at 69,113.5 h0.5 r90
C22: Mechanical 3 "CHIP0603" at 69,109.7 h0.5 r270
C23: Mechanical 3 "CHIP0603" at 65.5,113.5 h0.5 r90
C24: Mechanical 3 "CHIP0603" at 66,109.7 h0.5 r270
C25: Mechanical 3 "CHIP0603" at 62.5,113.5 h0.5 r90
C26: Mechanical 3 "CHIP0603" at 54.5,69 h0.5
C27: Mechanical 3 "CHIP0603" at 54.5,65 h0.5
C28: Mechanical 3 "CHIP0603" at 54.5,61 h0.5
C29: Mechanical 3 "CHIP0603" at 54.5,57 h0.5
C30: Mechanical 3 "CHIP0603" at 42.5,69 h0.5
C31: Mechanical 3 "CHIP0603" at 42.5,67 h0.5
C32: Mechanical 3 "CHIP0603" at 42.5,65 h0.5
C33: Mechanical 3 "CHIP0603" at 42.5,63 h0.5
C34: Mechanical 3 "CHIP0603" at 42.5,61 h0.5
C35: Mechanical 3 "CHIP0603" at 42.5,59 h0.5
C36: Mechanical 3 "CHIP0603" at 42.5,57 h0.5
C37: Mechanical 3 "CHIP0603" at 42.5,55 h0.5
C38: Mechanical 3 "CHIP0603" at 50,65 h0.5 r270
C39: Mechanical 3 "CHIP0603" at 50,61 h0.5 r270
C40: Mechanical 3 "CHIP0603" at 50,57 h0.5 r270
C41: Mechanical 3 "CHIP0603" at 50,53 h0.5 r270
C42: Mechanical 3 "CHIP0603" at 62.5,70.8 h0.5 r90
C43: Mechanical 3 "CHIP0603" at 66,67 h0.5 r270
C44: Mechanical 3 "CHIP0603" at 65.5,70.8 h0.5 r90
C45: Mechanical 3 "CHIP0603" at 69,67 h0.5 r270
C46: Mechanical 3 "CHIP0603" at 69,70.8 h0.5 r90
C47: Mechanical 3 "CHIP0603" at 72.5,67 h0.5 r270
C48: Mechanical 3 "CHIP0603" at 72,70.8 h0.5 r90
C49: Mechanical 3 "CHIP0603" at 75.5,67 h0.5 r270
C50: Mechanical 3 "CHIP0603" at 56.7,124.014 h0.5 r45
C51: Mechanical 3 "CHIP0603" at 56.7,116.014 h0.5 r45
C52: Mechanical 3 "CHIP0603" at 56.7,65.514 h0.5 r45
C53: Mechanical 3 "CHIP0603" at 56.7,57.514 h0.5 r45
C54: Mechanical 3 "CHIP0603" at 58.7,123.086 h0.5 r225
C55: Mechanical 3 "CHIP0603" at 58.7,115.086 h0.5 r225
C56: Mechanical 3 "CHIP0603" at 58.7,64.586 h0.5 r225
C57: Mechanical 3 "CHIP0603" at 58.7,56.586 h0.5 r225
C58: Mechanical 3 "CHIP1206" at 62.976,95.7 h0.51 r270
C59: Mechanical 3 "CHIP1206" at 62.976,80.2 h0.51 r270
C60: Mechanical 3 "CHIP0603" at 61.7,99.3 h0.5
C61: Mechanical 3 "CHIP0603" at 63.5,95.5 h0.5 r270
C62: Mechanical 3 "CHIP0603" at 57.9,95.5 h0.5 r180
C63: Mechanical 3 "CHIP0603" at 61.7,83.8 h0.5
C64: Mechanical 3 "CHIP0603" at 63.5,80 h0.5 r270
C65: Mechanical 3 "CHIP0603" at 57.9,80 h0.5 r180
C66: Mechanical 3 "CHIP0603" at 60.2,99.3 h0.5
C67: Mechanical 3 "CHIP0603" at 60.2,83.8 h0.5
C68: Mechanical 3 "CHIP0603" at 60.2,97.5 h0.5
C69: Mechanical 3 "CHIP0603" at 60.2,82 h0.5
C70: Mechanical 3 "CHIP0603" at 72.5,100.5 h0.5 r180
C71: Mechanical 3 "CHIP0603" at 68,100.5 h0.5 r180
C72: Mechanical 3 "CHIP0603" at 72,99 h0.5
C73: Mechanical 3 "CHIP0603" at 72.5,96 h0.5
C74: Mechanical 3 "CHIP0603" at 76,95.5 h0.5
C75: Mechanical 3 "CHIP0603" at 72.5,85 h0.5 r180
C76: Mechanical 3 "CHIP0603" at 68,85 h0.5 r180
C77: Mechanical 3 "CHIP0603" at 72,83.5 h0.5
C78: Mechanical 3 "CHIP0603" at 72.5,80.5 h0.5
C79: Mechanical 3 "CHIP0603" at 76,80 h0.5
C80: Mechanical 3 "CHIP0603" at 80.3,102.5 h0.5 r180
C81: Mechanical 3 "CHIP0603" at 80.3,93 h0.5 r180
C82: Mechanical 3 "CHIP0603" at 80.3,87 h0.5 r180
C83: Mechanical 3 "CHIP0603" at 80.3,77 h0.5 r180
C84: Mechanical 3 "CHIP0603" at 48.5,95.5 h0.5 r180
C85: Mechanical 3 "CHIP0603" at 48.5,84.5 h0.5 r180
Csup1: Mechanical 3 "CHIP0603" at 82.7,117.8 h0.5 r180
Csup2: Mechanical 3 "CEL-SMD300" at 89.132,122.412 h0.51 r90
Csup3: Mechanical 3 "CHIP0603" at 83,128.5 h0.5 r90
InCon_1: Mechanical 3 "DHR-F-15" at 22.717,113.706 h1.52 r90; Mechanical 3 "11" at 33.895,110.839 h1.52 r90; Mechanical 3 "15" at 33.895,127.951 h1.52 r90; Mechanical 3 "6" at 36.435,110.839 h1.52 r90; Mechanical 3 "10" at 36.435,127.951 h1.52 r90; Mechanical 3 "1" at 38.975,111.658 h1.52 r90; Mechanical 3 "5" at 38.829,128.759 h1.52 r90; Top Overlay "15" at 33.895,127.951 h1.5 r90; Top Overlay "10" at 36.435,127.951 h1.5 r90; Top Overlay "5" at 38.829,128.759 h1.5 r90; Top Overlay "11" at 33.895,110.839 h1.5 r90; Top Overlay "6" at 36.435,110.839 h1.5 r90; Top Overlay "1" at 38.975,111.658 h1.5 r90; Mechanical 2 "DHR-F-26" at 24.382,109.682 h0.51 r90
InCon_2: Mechanical 3 "DHR-F-15" at 22.717,54.056 h1.52 r90; Mechanical 3 "11" at 33.895,51.189 h1.52 r90; Mechanical 3 "15" at 33.895,68.301 h1.52 r90; Mechanical 3 "6" at 36.435,51.189 h1.52 r90; Mechanical 3 "10" at 36.435,68.301 h1.52 r90; Mechanical 3 "1" at 38.975,52.008 h1.52 r90; Mechanical 3 "5" at 38.829,69.109 h1.52 r90; Top Overlay "15" at 33.895,68.301 h1.52 r90; Top Overlay "10" at 36.435,68.301 h1.52 r90; Top Overlay "5" at 38.829,69.109 h1.52 r90; Top Overlay "11" at 33.895,51.189 h1.52 r90; Top Overlay "6" at 36.435,51.189 h1.52 r90; Top Overlay "1" at 38.975,52.008 h1.52 r90; Mechanical 2 "DHR-F-26" at 24.382,50.032 h0.51 r90
OutCon1: Mechanical 3 "FX2-52P-1.27DSL(71)" at 97.51,104.189 h1.52 r270
R1: Mechanical 3 "CHIP0603" at 42.5,125.5 h0.5 r180
R2: Mechanical 3 "CHIP0603" at 44.5,123.5 h0.5 r180
R3: Mechanical 3 "CHIP0603" at 42.5,121.5 h0.5 r180
R4: Mechanical 3 "CHIP0603" at 44.5,119.5 h0.5 r180
R5: Mechanical 3 "CHIP0603" at 42.5,117.5 h0.5 r180
R6: Mechanical 3 "CHIP0603" at 44.5,115.5 h0.5 r180
R7: Mechanical 3 "CHIP0603" at 42.5,113.5 h0.5 r180
R8: Mechanical 3 "CHIP0603" at 44.5,111.5 h0.5 r180
R9: Mechanical 3 "CHIP0603" at 51,125.5 h0.5 r180
R10: Mechanical 3 "CHIP0603" at 51,123.5 h0.5 r180
R11: Mechanical 3 "CHIP0603" at 51,121.5 h0.5 r180
R12: Mechanical 3 "CHIP0603" at 51,119.5 h0.5 r180
R13: Mechanical 3 "CHIP0603" at 51,117.5 h0.5 r180
R14: Mechanical 3 "CHIP0603" at 51,115.5 h0.5 r180
R15: Mechanical 3 "CHIP0603" at 51,113.5 h0.5 r180
R16: Mechanical 3 "CHIP0603" at 51,111.5 h0.5 r180
R17: Mechanical 3 "CHIP0603" at 50.7,127.5 h0.5
R18: Mechanical 3 "CHIP0603" at 54.5,123.2 h0.5 r180
R19: Mechanical 3 "CHIP0603" at 50.7,123.8 h0.5
R20: Mechanical 3 "CHIP0603" at 54.5,119.5 h0.5 r180
R21: Mechanical 3 "CHIP0603" at 50.7,119.5 h0.5
R22: Mechanical 3 "CHIP0603" at 54.5,115.2 h0.5 r180
R23: Mechanical 3 "CHIP0603" at 50.7,115.8 h0.5
R24: Mechanical 3 "CHIP0603" at 54.5,111.5 h0.5 r180
R25: Mechanical 3 "CHIP0603" at 75.5,113.5 h0.5 r270
R26: Mechanical 3 "CHIP0603" at 74,113.5 h0.5 r270
R27: Mechanical 3 "CHIP0603" at 72.5,113.5 h0.5 r270
R28: Mechanical 3 "CHIP0603" at 71,113.5 h0.5 r270
R29: Mechanical 3 "CHIP0603" at 69,113.5 h0.5 r270
R30: Mechanical 3 "CHIP0603" at 67.5,113.5 h0.5 r270
R31: Mechanical 3 "CHIP0603" at 66,113.5 h0.5 r270
R32: Mechanical 3 "CHIP0603" at 64.5,113.5 h0.5 r270
R33: Mechanical 3 "CHIP0603" at 42.5,67 h0.5 r180
R34: Mechanical 3 "CHIP0603" at 44.5,65 h0.5 r180
R35: Mechanical 3 "CHIP0603" at 42.5,63 h0.5 r180
R36: Mechanical 3 "CHIP0603" at 44.5,61 h0.5 r180
R37: Mechanical 3 "CHIP0603" at 42.5,59 h0.5 r180
R38: Mechanical 3 "CHIP0603" at 44.5,57 h0.5 r180
R39: Mechanical 3 "CHIP0603" at 42.5,55 h0.5 r180
R40: Mechanical 3 "CHIP0603" at 44.5,53 h0.5 r180
R41: Mechanical 3 "CHIP0603" at 51,67 h0.5 r180
R42: Mechanical 3 "CHIP0603" at 51,65 h0.5 r180
R43: Mechanical 3 "CHIP0603" at 51,63 h0.5 r180
R44: Mechanical 3 "CHIP0603" at 51,61 h0.5 r180
R45: Mechanical 3 "CHIP0603" at 51,59 h0.5 r180
R46: Mechanical 3 "CHIP0603" at 51,57 h0.5 r180
R47: Mechanical 3 "CHIP0603" at 51,55 h0.5 r180
R48: Mechanical 3 "CHIP0603" at 51,53 h0.5 r180
R49: Mechanical 3 "CHIP0603" at 50.7,69 h0.5
R50: Mechanical 3 "CHIP0603" at 54.5,64.7 h0.5 r180
R51: Mechanical 3 "CHIP0603" at 50.7,65.3 h0.5
R52: Mechanical 3 "CHIP0603" at 54.5,61 h0.5 r180
R53: Mechanical 3 "CHIP0603" at 50.7,61 h0.5
R54: Mechanical 3 "CHIP0603" at 54.5,56.7 h0.5 r180
R55: Mechanical 3 "CHIP0603" at 50.7,57.3 h0.5
R56: Mechanical 3 "CHIP0603" at 54.5,53 h0.5 r180
R57: Mechanical 3 "CHIP0603" at 62.5,67 h0.5 r90
R58: Mechanical 3 "CHIP0603" at 64,67 h0.5 r90
R59: Mechanical 3 "CHIP0603" at 65.5,67 h0.5 r90
R60: Mechanical 3 "CHIP0603" at 67,67 h0.5 r90
R61: Mechanical 3 "CHIP0603" at 69,67 h0.5 r90
R62: Mechanical 3 "CHIP0603" at 70.5,67 h0.5 r90
R63: Mechanical 3 "CHIP0603" at 72,67 h0.5 r90
R64: Mechanical 3 "CHIP0603" at 73.5,67 h0.5 r90
R65: Mechanical 3 "CHIP0603" at 64,99 h0.5 r180
R66: Mechanical 3 "CHIP0603" at 64,83.5 h0.5 r180
R67: Mechanical 3 "CHIP0603" at 46.5,97.5 h0.5 r90
R68: Mechanical 3 "CHIP0603" at 44.7,97.5 h0.5 r90
R69: Mechanical 3 "CHIP0603" at 44.9,101.3 h0.5 r270
R70: Mechanical 3 "CHIP0603" at 43,99.3 h0.5 r180
R71: Mechanical 3 "CHIP0603" at 48.49,84 h0.5 r270
R72: Mechanical 3 "CHIP0603" at 46.69,84 h0.5 r270
R73: Mechanical 3 "CHIP0603" at 43,80.2 h0.5 r90
R74: Mechanical 3 "CHIP0603" at 43,82 h0.5 r180
Rref1: Mechanical 3 "CHIP0603" at 76.8,123.5 h0.5 r180
Rref2: Mechanical 3 "CHIP0603" at 76.8,129.3 h0.5 r270
Usup2: Mechanical 2 "8SO200" at 46.762,92.484 h0.51 r270